# EAGLE board SparkFun_FreeSoC2_Panel_v10 (EAGLE 6.6.0), part 1 of 11
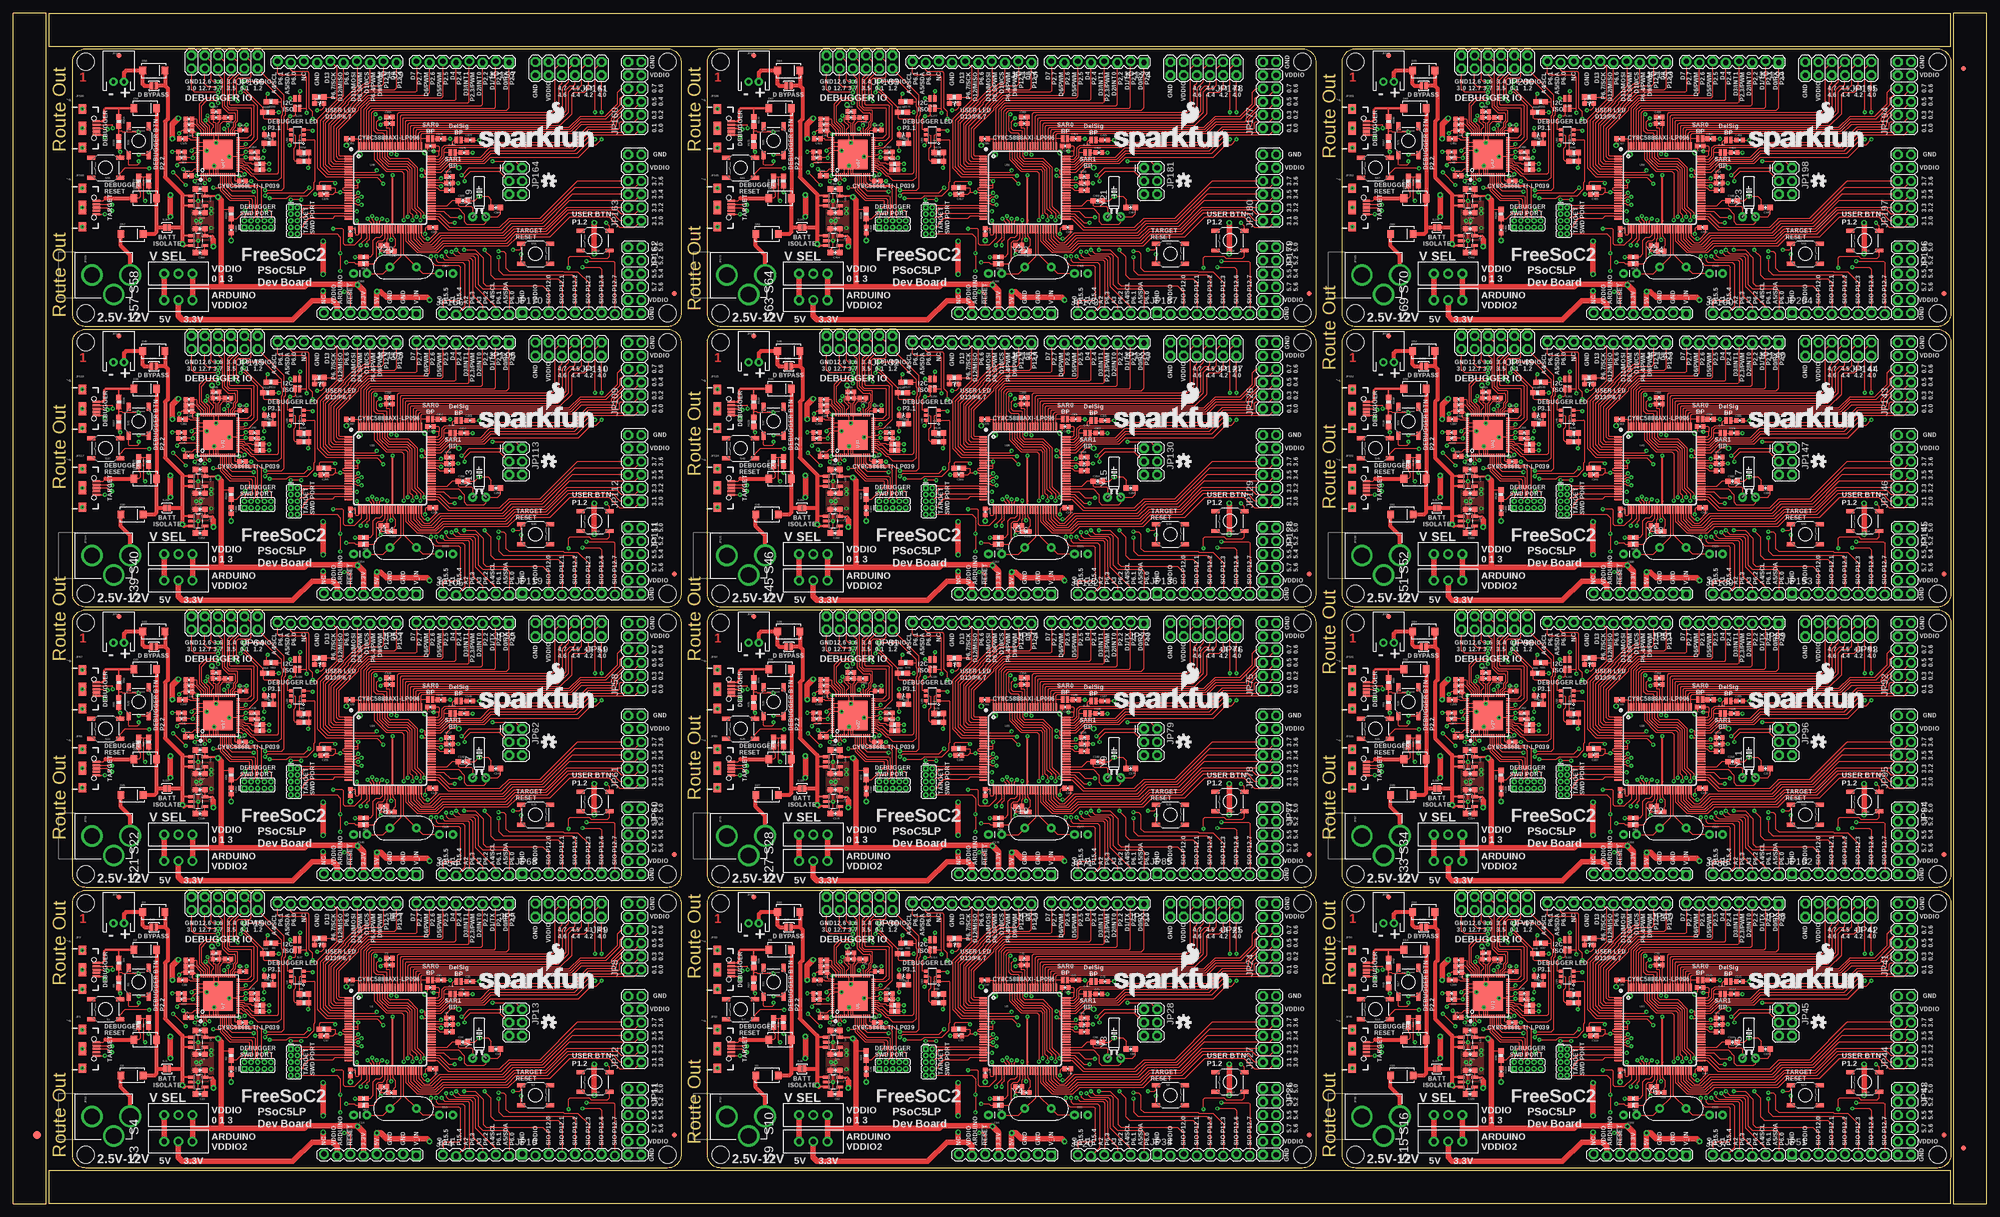
[diagram p0: board, top side]
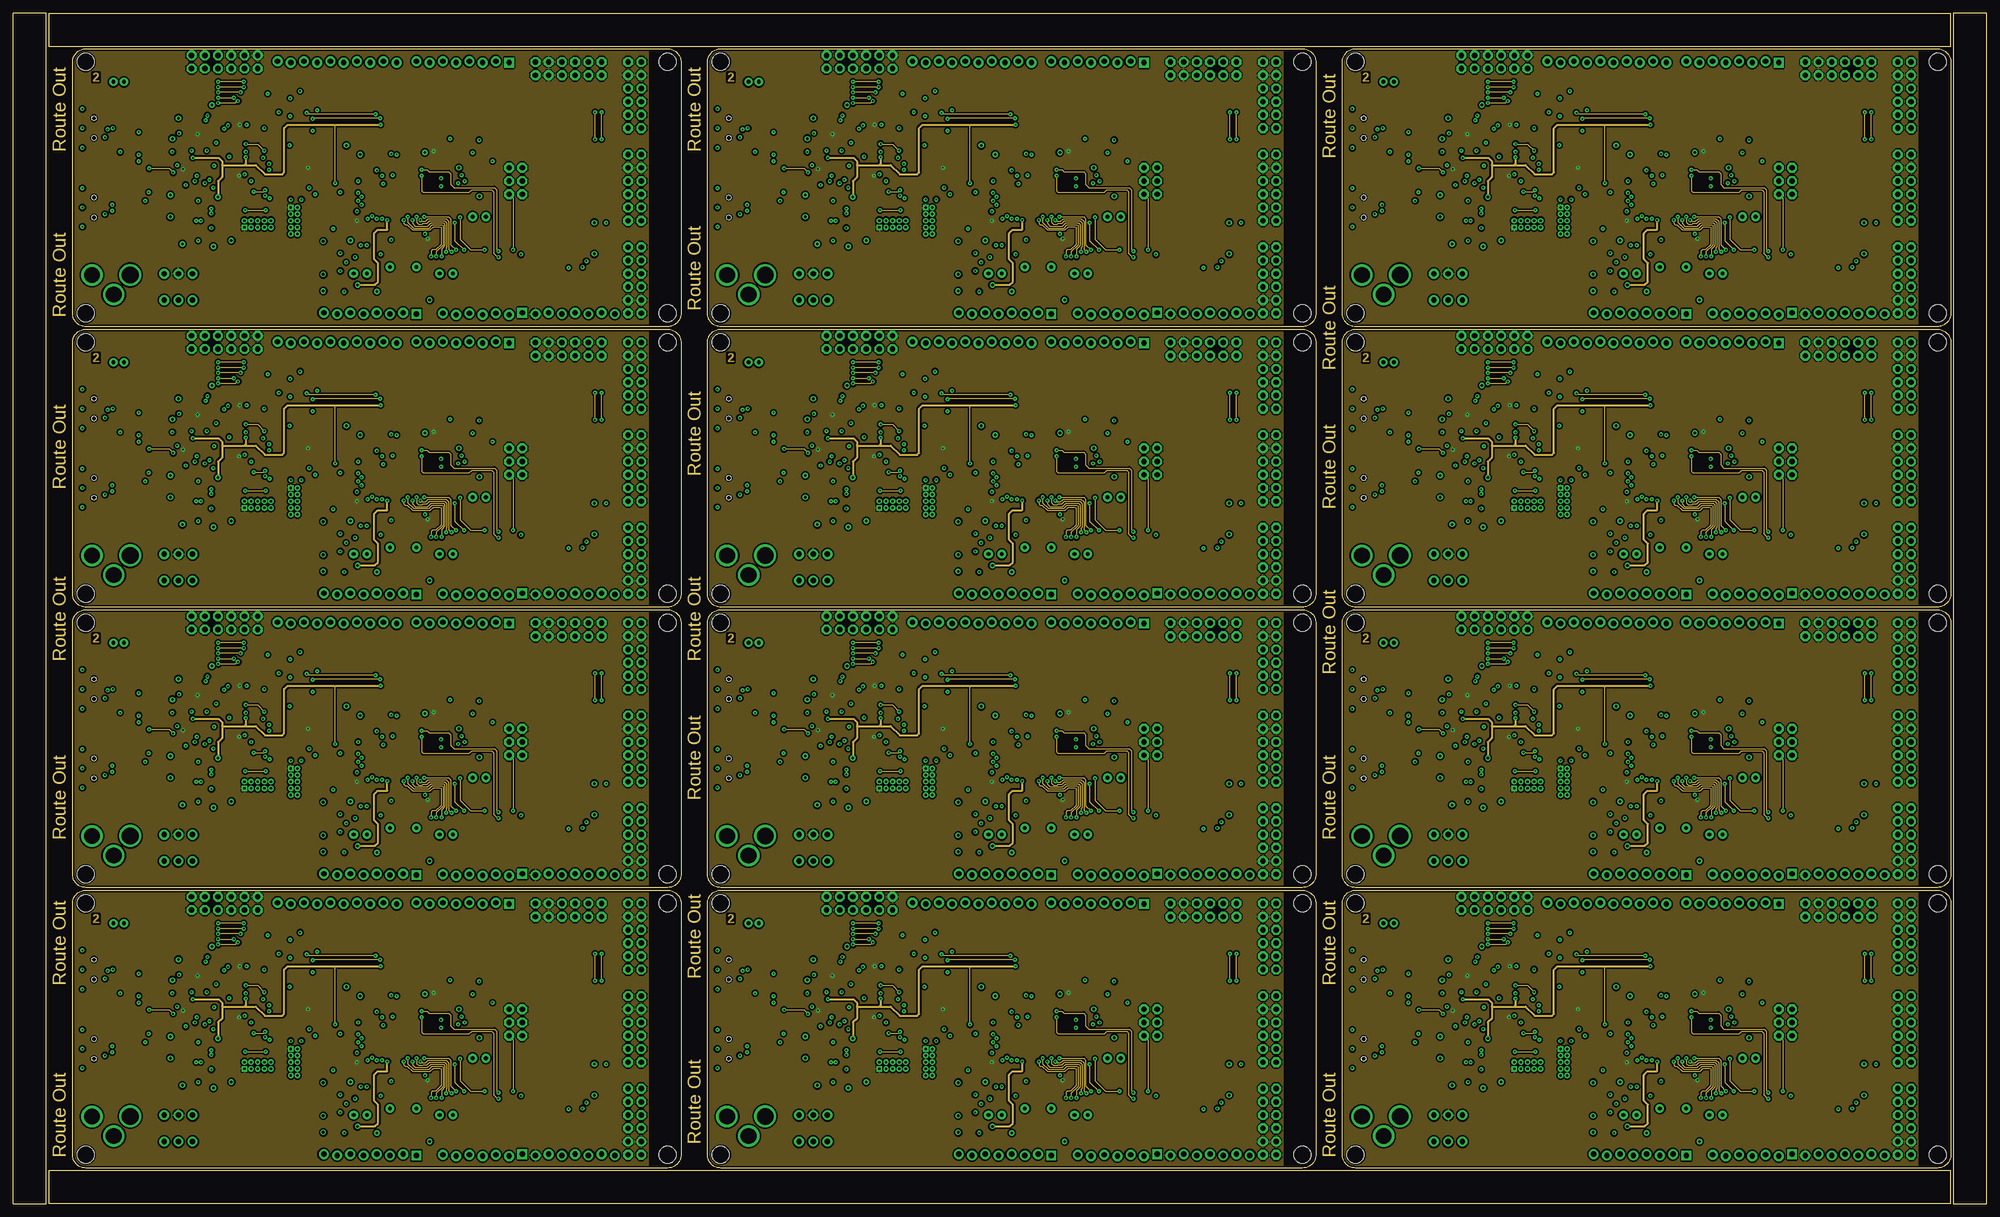
[diagram p1: board, inner layer Route2]
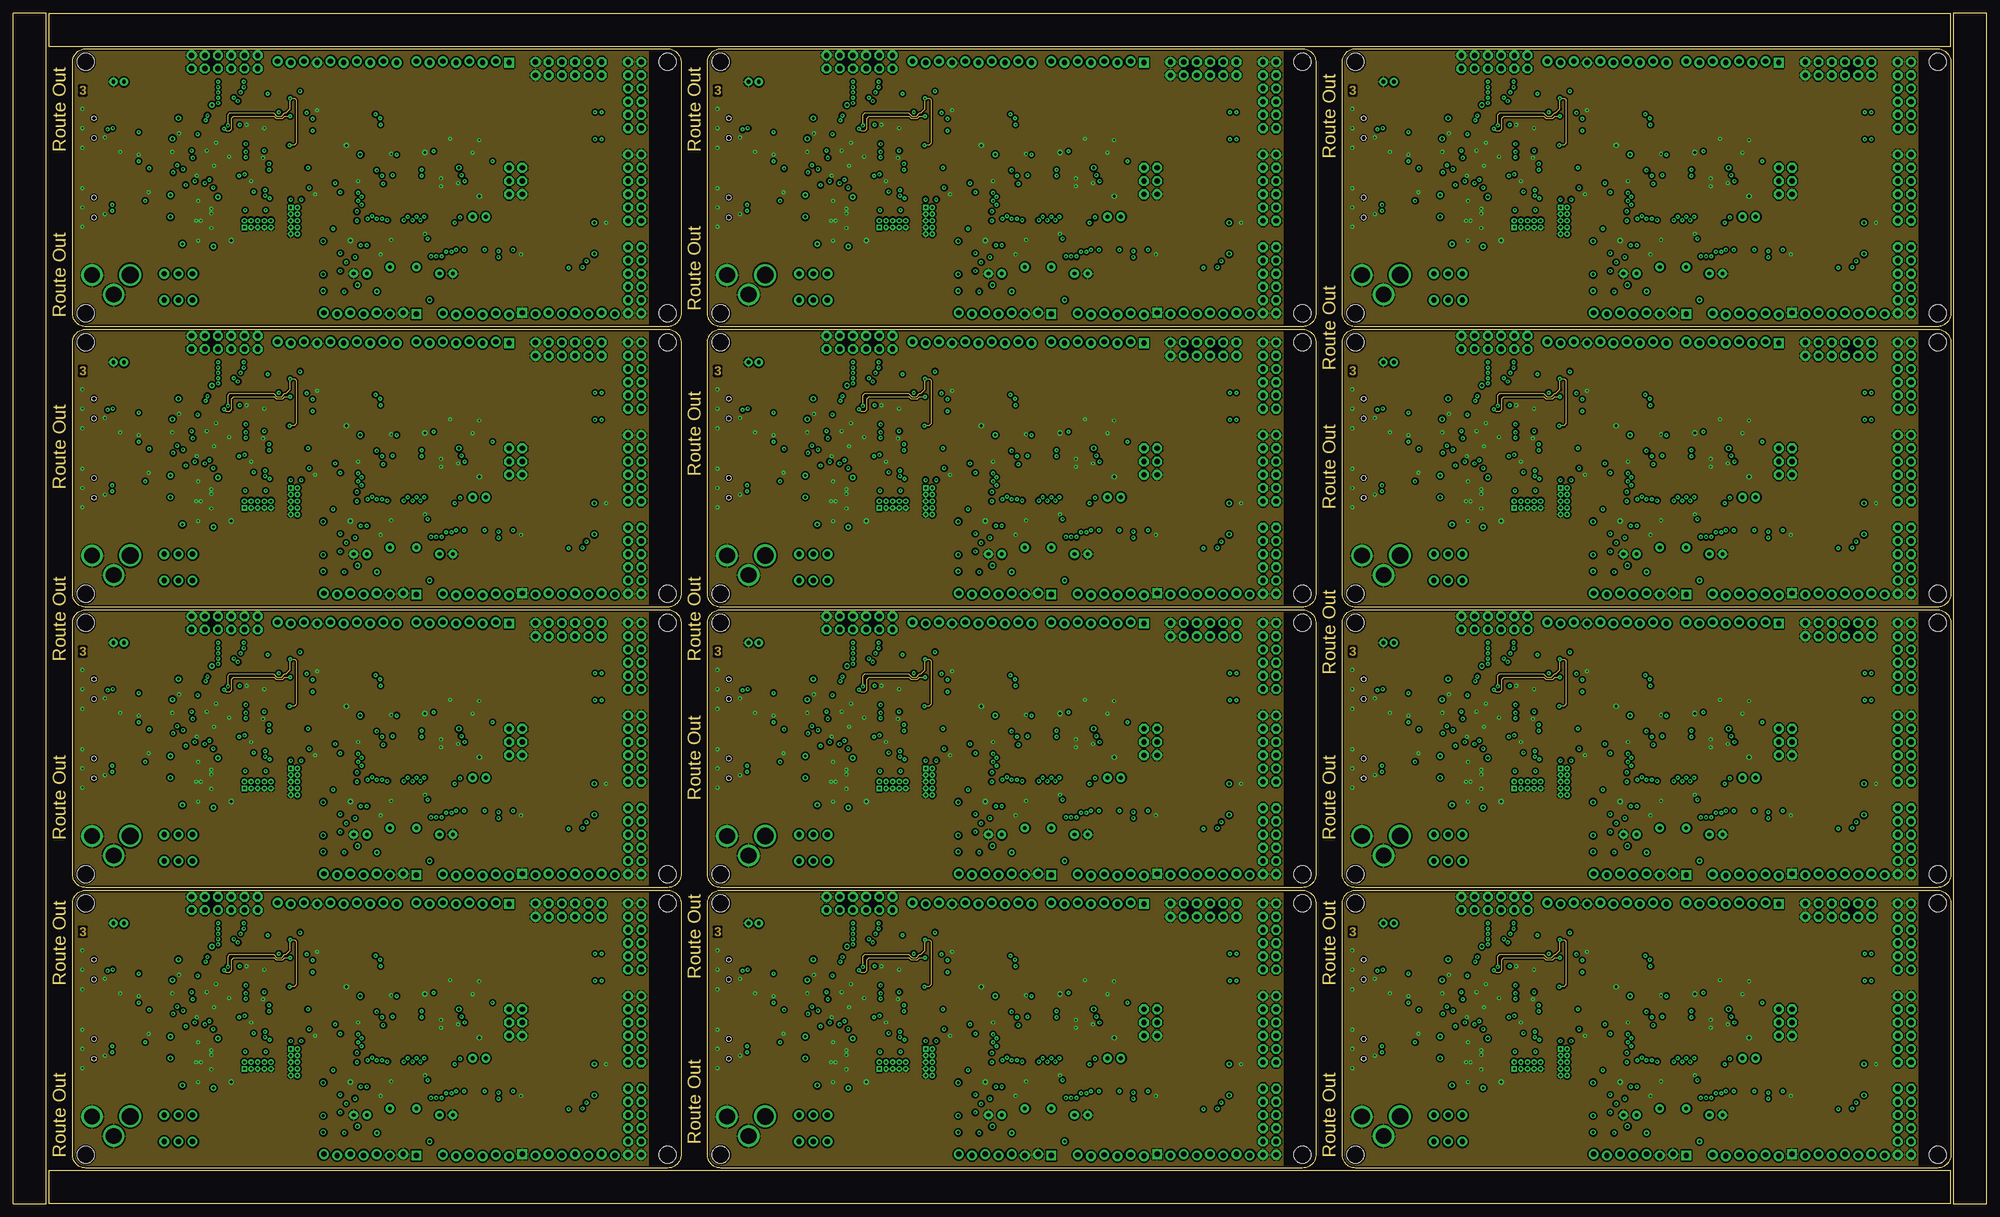
[diagram p2: board, inner layer Route15]
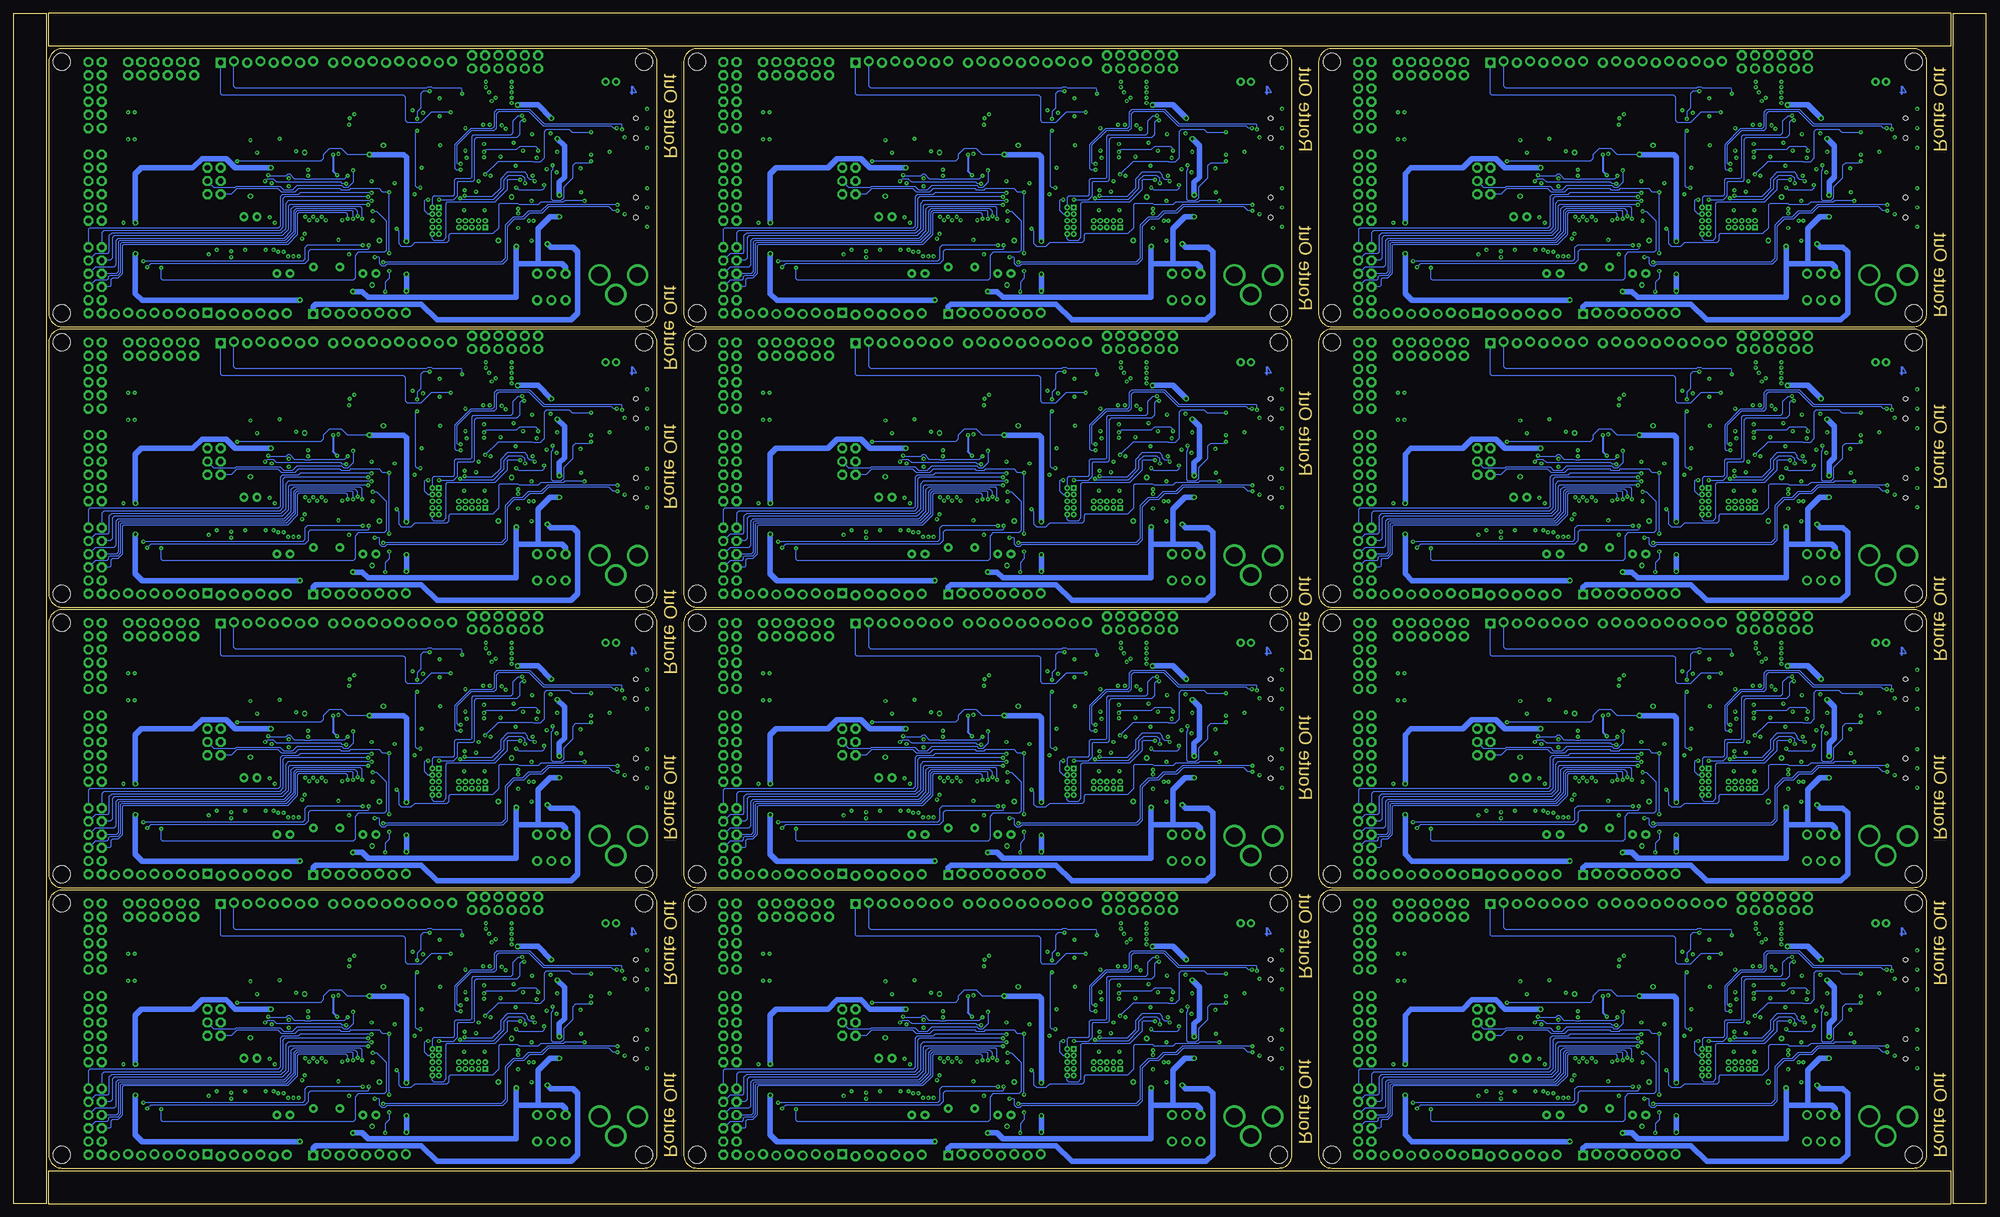
[diagram p3: board, bottom side, seen from below]

Size 378.97 x 228.6 mm. Coordinates in mm from the lower left corner, seen from the top.
Outline: 125.73,6.86 13.97,6.86 arc-90 11.43,9.4 11.43,57.66 arc-90 13.97,60.2 125.73,60.2 arc-90 128.27,57.66 128.27,9.4 arc-90 125.73,6.86
Outline: 247.65,6.86 135.89,6.86 arc-90 133.35,9.4 133.35,57.66 arc-90 135.89,60.2 247.65,60.2 arc-90 250.19,57.66 250.19,9.4 arc-90 247.65,6.86
Outline: 369.57,6.86 257.81,6.86 arc-90 255.27,9.4 255.27,57.66 arc-90 257.81,60.2 369.57,60.2 arc-90 372.11,57.66 372.11,9.4 arc-90 369.57,6.86
Outline: 125.73,60.71 13.97,60.71 arc-90 11.43,63.25 11.43,111.51 arc-90 13.97,114.05 125.73,114.05 arc-90 128.27,111.51 128.27,63.25 arc-90 125.73,60.71
Outline: 247.65,60.71 135.89,60.71 arc-90 133.35,63.25 133.35,111.51 arc-90 135.89,114.05 247.65,114.05 arc-90 250.19,111.51 250.19,63.25 arc-90 247.65,60.71
Outline: 369.57,60.71 257.81,60.71 arc-90 255.27,63.25 255.27,111.51 arc-90 257.81,114.05 369.57,114.05 arc-90 372.11,111.51 372.11,63.25 arc-90 369.57,60.71
Outline: 125.73,114.55 13.97,114.55 arc-90 11.43,117.09 11.43,165.35 arc-90 13.97,167.89 125.73,167.89 arc-90 128.27,165.35 128.27,117.09 arc-90 125.73,114.55
Outline: 247.65,114.55 135.89,114.55 arc-90 133.35,117.09 133.35,165.35 arc-90 135.89,167.89 247.65,167.89 arc-90 250.19,165.35 250.19,117.09 arc-90 247.65,114.55
Outline: 369.57,114.55 257.81,114.55 arc-90 255.27,117.09 255.27,165.35 arc-90 257.81,167.89 369.57,167.89 arc-90 372.11,165.35 372.11,117.09 arc-90 369.57,114.55
Outline: 125.73,168.4 13.97,168.4 arc-90 11.43,170.94 11.43,219.2 arc-90 13.97,221.74 125.73,221.74 arc-90 128.27,219.2 128.27,170.94 arc-90 125.73,168.4
Outline: 247.65,168.4 135.89,168.4 arc-90 133.35,170.94 133.35,219.2 arc-90 135.89,221.74 247.65,221.74 arc-90 250.19,219.2 250.19,170.94 arc-90 247.65,168.4
Outline: 369.57,168.4 257.81,168.4 arc-90 255.27,170.94 255.27,219.2 arc-90 257.81,221.74 369.57,221.74 arc-90 372.11,219.2 372.11,170.94 arc-90 369.57,168.4
Outline: 6.35,0 6.35,228.6 0,228.6 0,0 6.35,0
Outline: 6.86,6.35 6.86,0 372.11,0 372.11,6.35 6.86,6.35
Outline: 372.62,0 378.97,0 378.97,228.6 372.62,228.6 372.62,0
Outline: 372.11,222.25 372.11,228.6 6.86,228.6 6.86,222.25 372.11,222.25
Copper layers (1*2*15*16): Top 0.035mm / dielectric 1.5mm / Route2 0.035mm / dielectric 0.15mm / Route15 0.035mm / dielectric 0.2mm / Bottom 0.035mm
Design rules "Sparkfun-x *": minimum track width 6mil, minimum drill 10mil, track to track 6mil, track to pad 6mil, pad to pad 6mil, via to via 8mil, smd to smd 6mil, copper to edge 6mil, drill to drill 8mil, minimum pad ring 12mil, minimum via ring 10mil, stop-mask expansion 4mil, vias tented up to drill 20mil, thermal gap 10mil
Net classes: 0 signal: width 0.203 mm, drill 0.254 mm, clearance 0.152 mm; 1 AVCC: width 0.508 mm, drill 0.508 mm, clearance 0.152 mm; 2 ARDUINO_VCC: width 0.508 mm, drill 0.381 mm

## Footprints (pad centres in the part's own frame; a part is rotated, then mirrored left to right if it is on the bottom)
0402-CAP = smd 0.85 x 0.9: 1 -0.58,0; 2 0.58,0
0603-CAP = smd 1.1 x 1: 1 -0.85,0; 2 0.85,0
CAP-PTH-SMALL = drill 0.7 pad 1.651: 1 0,0; 2 2.54,0
SMA-DIODE = smd 1.27 x 1.47: A -2.15,0; C 2.15,0
LED-0603 = smd 1 x 1: A 0,-0.877; C 0,0.877
FIDUCIAL-1.5X3 = smd 1.5 x 1.5: 1 0,0
FIDUCIAL-1X2 = smd 1 x 1: 1 0,0
USB-B-MICRO-SMD_V03 = smd 1.4 x 0.4: D+1 2.7,0; D-1 2.7,0.65; GND1 2.7,-1.3; ID1 2.7,-0.65; VBUS1 2.7,1.3 | smd 1.5 x 1.8: SHIELD1 0,3.7; SHIELD2 0,-3.7 | smd 1.5 x 2.5: SHIELD3 0,0 | hole 0.85: 2.2,1.9; 2.2,-1.9
JST-2-PTH = drill 0.7 pad 1.6: 1 -1,0; 2 1,0
1X06-SIP_LOCK = drill 1.016 pad 1.88: 1 0,0; 2 2.54,-0.254; 3 5.08,0; 4 7.62,-0.254; 5 10.16,0; 6 12.7,-0.254
1X08_LOCK = drill 1.016 pad 1.88 square: 1 0,0.127 | drill 1.016 pad 1.88: 2 2.54,-0.127; 3 5.08,0.127; 4 7.62,-0.127; 5 10.16,0.127; 6 12.7,-0.127; 7 15.24,0.127; 8 17.78,-0.127
1X10_LOCK = drill 1.016 pad 1.88: 1 0,0.127; 2 2.54,-0.127; 3 5.08,0.127; 4 7.62,-0.127; 5 10.16,0.127; 6 12.7,-0.127; 7 15.24,0.127; 8 17.78,-0.127; 9 20.32,0.127; 10 22.86,-0.127
2X6 = drill 1.016 pad 1.88 octagon: 1 0,0; 2 0,2.54; 3 2.54,0; 4 2.54,2.54; 5 5.08,0; 6 5.08,2.54; 7 7.62,0; 8 7.62,2.54; 9 10.16,0; 10 10.16,2.54; 11 12.7,0; 12 12.7,2.54
2X3 = drill 1.016 pad 1.88 octagon: 1 0,0; 2 0,2.54; 3 2.54,0; 4 2.54,2.54; 5 5.08,0; 6 5.08,2.54
2X5_PTH_SILK_.05 = drill 0.432 square: 1 0,6.35 | drill 0.432: 2 1.27,6.35; 3 0,5.08; 4 1.27,5.08; 5 0,3.81; 6 1.27,3.81; 7 0,2.54; 8 1.27,2.54; 9 0,1.27; 10 1.27,1.27
POWER_JACK_PTH_LOCK = drill 2.997 pad 4.115: GND 0.025,6.557; GNDBREAK 3.762,10.7 | drill 3.2 pad 4.115: PWR 0,13.878
0603-RES = smd 1.1 x 1: 1 -0.85,0; 2 0.85,0
0402-RES = smd 0.85 x 0.9: 1 -0.58,0; 2 0.58,0
TACTILE-SWITCH-SMD = smd 1.524 x 0.762: 1 -2.794,1.905; 2 2.794,1.905; 3 -2.794,-1.905; 4 2.794,-1.905
SWITCH-SPDT_LOCK.007S = drill 1.016 pad 1.88: 1 0,2.718; 2 0,0; 3 0,-2.718
PAD-JUMPER-2-NC_BY_PASTE_YES_SILK = smd 0.635 x 1.27: 1 -0.401,0; 2 0.413,0
PAD-JUMPER-2-NO_YES_SILK = smd 0.635 x 1.27: 1 -0.45,0; 2 0.45,0
PAD-JUMPER-2-NO_NO_SILK = smd 0.635 x 1.27: 1 -0.45,0; 2 0.45,0
STAND-OFF = hole 3.302: 0,0
TQFP-100-14X14MM = smd 1.5 x 0.27: 1 -8,6; 2 -8,5.5; 3 -8,5; 4 -8,4.5; 5 -8,4; 6 -8,3.5; 7 -8,3; 8 -8,2.5; 9 -8,2; 10 -8,1.5; 11 -8,1; 12 -8,0.5; 13 -8,0; 14 -8,-0.5; 15 -8,-1; 16 -8,-1.5; 17 -8,-2; 18 -8,-2.5; 19 -8,-3; 20 -8,-3.5; 21 -8,-4; 22 -8,-4.5; 23 -8,-5; 24 -8,-5.5; 25 -8,-6; 51 8,-6; 52 8,-5.5; 53 8,-5; 54 8,-4.5; 55 8,-4; 56 8,-3.5; 57 8,-3; 58 8,-2.5; 59 8,-2; 60 8,-1.5; 61 8,-1; 62 8,-0.5; 63 8,0; 64 8,0.5; 65 8,1; 66 8,1.5; 67 8,2; 68 8,2.5; 69 8,3; 70 8,3.5; 71 8,4; 72 8,4.5; 73 8,5; 74 8,5.5; 75 8,6 | smd 0.27 x 1.5: 26 -6,-8; 27 -5.5,-8; 28 -5,-8; 29 -4.5,-8; 30 -4,-8; 31 -3.5,-8; 32 -3,-8; 33 -2.5,-8; 34 -2,-8; 35 -1.5,-8; 36 -1,-8; 37 -0.5,-8; 38 0,-8; 39 0.5,-8; 40 1,-8; 41 1.5,-8; 42 2,-8; 43 2.5,-8; 44 3,-8; 45 3.5,-8; 46 4,-8; 47 4.5,-8; 48 5,-8; 49 5.5,-8; 50 6,-8; 76 6,8; 77 5.5,8; 78 5,8; 79 4.5,8; 80 4,8; 81 3.5,8; 82 3,8; 83 2.5,8; 84 2,8; 85 1.5,8; 86 1,8; 87 0.5,8; 88 0,8; 89 -0.5,8; 90 -1,8; 91 -1.5,8; 92 -2,8; 93 -2.5,8; 94 -3,8; 95 -3.5,8; 96 -4,8; 97 -4.5,8; 98 -5,8; 99 -5.5,8; 100 -6,8
SOT23-5 = smd 0.55 x 1.2: 1 -0.95,-1.3; 2 0,-1.3; 3 0.95,-1.3; 4 0.95,1.3; 5 -0.95,1.3
SOT26 = smd 0.55 x 0.8: D1 -0.95,1.2; D2 0.95,1.2; G1 -0.95,-1.2; G2 0.95,-1.2; S1 0,1.2; S2 0,-1.2
QFN-68 = smd 0.6 x 0.2: 1 -3.9,3.2; 2 -3.9,2.8; 3 -3.9,2.4; 4 -3.9,2; 5 -3.9,1.6; 6 -3.9,1.2; 7 -3.9,0.8; 8 -3.9,0.4; 9 -3.9,0; 10 -3.9,-0.4; 11 -3.9,-0.8; 12 -3.9,-1.2; 13 -3.9,-1.6; 14 -3.9,-2; 15 -3.9,-2.4; 16 -3.9,-2.8; 17 -3.9,-3.2; 35 3.9,-3.2; 36 3.9,-2.8; 37 3.9,-2.4; 38 3.9,-2; 39 3.9,-1.6; 40 3.9,-1.2; 41 3.9,-0.8; 42 3.9,-0.4; 43 3.9,0; 44 3.9,0.4; 45 3.9,0.8; 46 3.9,1.2; 47 3.9,1.6; 48 3.9,2; 49 3.9,2.4; 50 3.9,2.8; 51 3.9,3.2 | smd 0.2 x 0.6: 18 -3.2,-3.9; 19 -2.8,-3.9; 20 -2.4,-3.9; 21 -2,-3.9; 22 -1.6,-3.9; 23 -1.2,-3.9; 24 -0.8,-3.9; 25 -0.4,-3.9; 26 0,-3.9; 27 0.4,-3.9; 28 0.8,-3.9; 29 1.2,-3.9; 30 1.6,-3.9; 31 2,-3.9; 32 2.4,-3.9; 33 2.8,-3.9; 34 3.2,-3.9; 52 3.2,3.9; 53 2.8,3.9; 54 2.4,3.9; 55 2,3.9; 56 1.6,3.9; 57 1.2,3.9; 58 0.8,3.9; 59 0.4,3.9; 60 0,3.9; 61 -0.4,3.9; 62 -0.8,3.9; 63 -1.2,3.9; 64 -1.6,3.9; 65 -2,3.9; 66 -2.4,3.9; 67 -2.8,3.9; 68 -3.2,3.9 | smd 5.7 x 5.7: 69 0,0
TC26H = drill 0.813 pad 1.676: 1 -1.27,0; 2 1.27,0
HC49US = drill 0.7 pad 1.651: 1 -2.54,0; 2 2.54,0

## Placement (x,y rotation side)
C1  1.0uF  [0402-CAP]  83.82,33.02 0 top
C2  1.0uF  [0402-CAP]  72.26,47.12 0 top
C3  0.1uF  [0402-CAP]  72.26,45.85 0 top
C4  1.0uF  [0402-CAP]  71.25,22.48 180 top
C5  1.0uF  [0402-CAP]  83.82,35.69 0 top
C6  0.1uF  [0402-CAP]  83.82,34.42 0 top
C7  1.0uF  [0402-CAP]  72.64,21.34 180 top
C8  470pF  [0603-CAP]  35.94,28.7 180 top
C9  0.1uF  [0402-CAP]  80.64,25.91 180 top
C10  470pF  [0603-CAP]  35.94,21.08 180 top
C11  0.1uF  [0402-CAP]  64.64,42.93 180 top
C12  [CAP-PTH-SMALL]  81.92,17.02 0 top
C13  0.1uF  [0402-CAP]  64.77,25.15 270 top
C14  [CAP-PTH-SMALL]  67.94,17.02 180 top
C15  0.1uF  [0402-CAP]  80.14,41.53 180 top
C16  1.0uF  [0402-CAP]  46.35,40.39 0 top
C17  1.0uF  [0402-CAP]  41.27,46.99 180 top
C18  22pF  [0603-CAP]  92.71,29.72 180 top
C19  1.0uF  [0402-CAP]  32.38,40.39 180 top
C20  1.0uF  [0402-CAP]  38.99,48.13 0 top
C21  0.1uF  [0402-CAP]  46.35,39.24 0 top
C22  0.1uF  [0402-CAP]  32.38,39.24 180 top
C23  0.1uF  [0402-CAP]  38.99,46.99 0 top
C24  22pF  [0603-CAP]  86.36,30.99 0 top
C25  0.1uF  [0402-CAP]  33.66,35.81 0 top
C26  2.2uF  [0603-CAP]  35.94,33.27 0 top
C27  0.1uF  [0402-CAP]  44.07,34.8 0 top
C28  2.2uF  [0603-CAP]  35.94,25.65 0 top
C29  0.1uF  [0402-CAP]  44.2,44.58 0 top
C30  0.1uF  [0402-CAP]  33.78,45.59 180 top
C31  0.1uF  [0402-CAP]  33.78,44.45 180 top
C32  0.1uF  [0402-CAP]  33.78,46.74 180 top
C33  0.1uF  [0402-CAP]  32.51,42.93 180 top
C34  0.1uF  [0402-CAP]  82.17,42.93 0 top
C35  0.1uF  [0402-CAP]  87.76,42.67 0 top
C36  0.1uF  [0402-CAP]  86.61,40.26 0 top
C37  0.1uF  [0402-CAP]  59.69,32.26 180 top
C38  0.1uF  [0402-CAP]  41.91,25.4 270 top
C39  1.0uF  [0402-CAP]  205.74,33.02 0 top
C40  1.0uF  [0402-CAP]  194.18,47.12 0 top
C41  1.0uF  [0402-CAP]  205.74,35.69 0 top
C42  0.1uF  [0402-CAP]  205.74,34.42 0 top
C43  0.1uF  [0402-CAP]  194.18,45.85 0 top
C44  1.0uF  [0402-CAP]  193.17,22.48 180 top
C45  1.0uF  [0402-CAP]  194.56,21.34 180 top
C46  0.1uF  [0402-CAP]  202.56,25.91 180 top
C47  0.1uF  [0402-CAP]  186.56,42.93 180 top
C48  0.1uF  [0402-CAP]  186.69,25.15 270 top
C49  0.1uF  [0402-CAP]  202.06,41.53 180 top
C50  1.0uF  [0402-CAP]  168.28,40.39 0 top
C51  1.0uF  [0402-CAP]  163.19,46.99 180 top
C52  1.0uF  [0402-CAP]  154.31,40.39 180 top
C53  1.0uF  [0402-CAP]  160.91,48.13 0 top
C54  0.1uF  [0402-CAP]  168.28,39.24 0 top
C55  0.1uF  [0402-CAP]  154.31,39.24 180 top
C56  0.1uF  [0402-CAP]  160.91,46.99 0 top
C57  0.1uF  [0402-CAP]  155.57,35.81 0 top
C58  0.1uF  [0402-CAP]  165.99,34.8 0 top
C59  0.1uF  [0402-CAP]  166.12,44.58 0 top
C60  0.1uF  [0402-CAP]  155.7,44.45 180 top
C61  470pF  [0603-CAP]  157.86,28.7 180 top
C62  470pF  [0603-CAP]  157.86,21.08 180 top
C63  [CAP-PTH-SMALL]  203.84,17.02 0 top
C64  [CAP-PTH-SMALL]  189.87,17.02 180 top
C65  22pF  [0603-CAP]  214.63,29.72 180 top
C66  22pF  [0603-CAP]  208.28,30.99 0 top
C67  2.2uF  [0603-CAP]  157.86,33.27 0 top
C68  2.2uF  [0603-CAP]  157.86,25.65 0 top
C69  0.1uF  [0402-CAP]  155.7,45.59 180 top
C70  0.1uF  [0402-CAP]  155.7,46.74 180 top
C71  0.1uF  [0402-CAP]  154.43,42.93 180 top
C72  0.1uF  [0402-CAP]  204.09,42.93 0 top
C73  0.1uF  [0402-CAP]  209.68,42.67 0 top
C74  0.1uF  [0402-CAP]  208.53,40.26 0 top
C75  0.1uF  [0402-CAP]  181.61,32.26 180 top
C76  0.1uF  [0402-CAP]  163.83,25.4 270 top
C77  1.0uF  [0402-CAP]  327.66,33.02 0 top
C78  1.0uF  [0402-CAP]  316.1,47.12 0 top
C79  1.0uF  [0402-CAP]  327.66,35.69 0 top
C80  0.1uF  [0402-CAP]  327.66,34.42 0 top
C81  0.1uF  [0402-CAP]  316.1,45.85 0 top
C82  1.0uF  [0402-CAP]  315.09,22.48 180 top
C83  1.0uF  [0402-CAP]  316.48,21.34 180 top
C84  0.1uF  [0402-CAP]  324.49,25.91 180 top
C85  0.1uF  [0402-CAP]  308.48,42.93 180 top
C86  0.1uF  [0402-CAP]  308.61,25.15 270 top
C87  0.1uF  [0402-CAP]  323.98,41.53 180 top
C88  1.0uF  [0402-CAP]  290.19,40.39 0 top
C89  1.0uF  [0402-CAP]  285.12,46.99 180 top
C90  1.0uF  [0402-CAP]  276.23,40.39 180 top
C91  1.0uF  [0402-CAP]  282.83,48.13 0 top
C92  0.1uF  [0402-CAP]  290.19,39.24 0 top
C93  0.1uF  [0402-CAP]  276.23,39.24 180 top
C94  0.1uF  [0402-CAP]  282.83,46.99 0 top
C95  0.1uF  [0402-CAP]  277.5,35.81 0 top
C96  0.1uF  [0402-CAP]  287.91,34.8 0 top
C97  0.1uF  [0402-CAP]  288.04,44.58 0 top
C98  0.1uF  [0402-CAP]  277.62,44.45 180 top
C99  470pF  [0603-CAP]  279.78,28.7 180 top
C100  470pF  [0603-CAP]  279.78,21.08 180 top
C101  [CAP-PTH-SMALL]  325.75,17.02 0 top
C102  [CAP-PTH-SMALL]  311.79,17.02 180 top
C103  22pF  [0603-CAP]  336.55,29.72 180 top
C104  22pF  [0603-CAP]  330.2,30.99 0 top
C105  2.2uF  [0603-CAP]  279.78,33.27 0 top
C106  2.2uF  [0603-CAP]  279.78,25.65 0 top
C107  0.1uF  [0402-CAP]  277.62,45.59 180 top
C108  0.1uF  [0402-CAP]  277.62,46.74 180 top
C109  0.1uF  [0402-CAP]  276.35,42.93 180 top
C110  0.1uF  [0402-CAP]  326.01,42.93 0 top
C111  0.1uF  [0402-CAP]  331.6,42.67 0 top
C112  0.1uF  [0402-CAP]  330.45,40.26 0 top
C113  0.1uF  [0402-CAP]  303.53,32.26 180 top
C114  0.1uF  [0402-CAP]  285.75,25.4 270 top
C115  1.0uF  [0402-CAP]  83.82,86.87 0 top
C116  1.0uF  [0402-CAP]  72.26,100.97 0 top
C117  1.0uF  [0402-CAP]  83.82,89.53 0 top
C118  0.1uF  [0402-CAP]  83.82,88.27 0 top
C119  0.1uF  [0402-CAP]  72.26,99.69 0 top
C120  1.0uF  [0402-CAP]  71.25,76.33 180 top
C121  1.0uF  [0402-CAP]  72.64,75.18 180 top
C122  0.1uF  [0402-CAP]  80.64,79.76 180 top
C123  0.1uF  [0402-CAP]  64.64,96.77 180 top
C124  0.1uF  [0402-CAP]  64.77,78.99 270 top
C125  0.1uF  [0402-CAP]  80.14,95.38 180 top
C126  1.0uF  [0402-CAP]  46.35,94.23 0 top
C127  1.0uF  [0402-CAP]  41.27,100.84 180 top
C128  1.0uF  [0402-CAP]  32.38,94.23 180 top
C129  1.0uF  [0402-CAP]  38.99,101.98 0 top
C130  0.1uF  [0402-CAP]  46.35,93.09 0 top
C131  0.1uF  [0402-CAP]  32.38,93.09 180 top
C132  0.1uF  [0402-CAP]  38.99,100.84 0 top
C133  0.1uF  [0402-CAP]  33.66,89.66 0 top
C134  0.1uF  [0402-CAP]  44.07,88.65 0 top
C135  0.1uF  [0402-CAP]  44.2,98.42 0 top
C136  0.1uF  [0402-CAP]  33.78,98.3 180 top
C137  470pF  [0603-CAP]  35.94,82.55 180 top
C138  470pF  [0603-CAP]  35.94,74.93 180 top
C139  [CAP-PTH-SMALL]  81.92,70.87 0 top
C140  [CAP-PTH-SMALL]  67.94,70.87 180 top
C141  22pF  [0603-CAP]  92.71,83.57 180 top
C142  22pF  [0603-CAP]  86.36,84.84 0 top
C143  2.2uF  [0603-CAP]  35.94,87.12 0 top
C144  2.2uF  [0603-CAP]  35.94,79.5 0 top
C145  0.1uF  [0402-CAP]  33.78,99.44 180 top
C146  0.1uF  [0402-CAP]  33.78,100.58 180 top
C147  0.1uF  [0402-CAP]  32.51,96.77 180 top
C148  0.1uF  [0402-CAP]  82.17,96.77 0 top
C149  0.1uF  [0402-CAP]  87.76,96.52 0 top
C150  0.1uF  [0402-CAP]  86.61,94.11 0 top
C151  0.1uF  [0402-CAP]  59.69,86.11 180 top
C152  0.1uF  [0402-CAP]  41.91,79.25 270 top
C153  1.0uF  [0402-CAP]  205.74,86.87 0 top
C154  1.0uF  [0402-CAP]  194.18,100.97 0 top
C155  1.0uF  [0402-CAP]  205.74,89.53 0 top
C156  0.1uF  [0402-CAP]  205.74,88.27 0 top
C157  0.1uF  [0402-CAP]  194.18,99.69 0 top
C158  1.0uF  [0402-CAP]  193.17,76.33 180 top
C159  1.0uF  [0402-CAP]  194.56,75.18 180 top
C160  0.1uF  [0402-CAP]  202.56,79.76 180 top
C161  0.1uF  [0402-CAP]  186.56,96.77 180 top
C162  0.1uF  [0402-CAP]  186.69,78.99 270 top
C163  0.1uF  [0402-CAP]  202.06,95.38 180 top
C164  1.0uF  [0402-CAP]  168.28,94.23 0 top
C165  1.0uF  [0402-CAP]  163.19,100.84 180 top
C166  1.0uF  [0402-CAP]  154.31,94.23 180 top
C167  1.0uF  [0402-CAP]  160.91,101.98 0 top
C168  0.1uF  [0402-CAP]  168.28,93.09 0 top
C169  0.1uF  [0402-CAP]  154.31,93.09 180 top
C170  0.1uF  [0402-CAP]  160.91,100.84 0 top
C171  0.1uF  [0402-CAP]  155.57,89.66 0 top
C172  0.1uF  [0402-CAP]  165.99,88.65 0 top
C173  0.1uF  [0402-CAP]  166.12,98.42 0 top
C174  0.1uF  [0402-CAP]  155.7,98.3 180 top
C175  470pF  [0603-CAP]  157.86,82.55 180 top
C176  470pF  [0603-CAP]  157.86,74.93 180 top
C177  [CAP-PTH-SMALL]  203.84,70.87 0 top
C178  [CAP-PTH-SMALL]  189.87,70.87 180 top
C179  22pF  [0603-CAP]  214.63,83.57 180 top
C180  22pF  [0603-CAP]  208.28,84.84 0 top
C181  2.2uF  [0603-CAP]  157.86,87.12 0 top
C182  2.2uF  [0603-CAP]  157.86,79.5 0 top
C183  0.1uF  [0402-CAP]  155.7,99.44 180 top
C184  0.1uF  [0402-CAP]  155.7,100.58 180 top
C185  0.1uF  [0402-CAP]  154.43,96.77 180 top
C186  0.1uF  [0402-CAP]  204.09,96.77 0 top
C187  0.1uF  [0402-CAP]  209.68,96.52 0 top
C188  0.1uF  [0402-CAP]  208.53,94.11 0 top
C189  0.1uF  [0402-CAP]  181.61,86.11 180 top
C190  0.1uF  [0402-CAP]  163.83,79.25 270 top
C191  1.0uF  [0402-CAP]  327.66,86.87 0 top
C192  1.0uF  [0402-CAP]  316.1,100.97 0 top
C193  1.0uF  [0402-CAP]  327.66,89.53 0 top
C194  0.1uF  [0402-CAP]  327.66,88.27 0 top
C195  0.1uF  [0402-CAP]  316.1,99.69 0 top
C196  1.0uF  [0402-CAP]  315.09,76.33 180 top
C197  1.0uF  [0402-CAP]  316.48,75.18 180 top
C198  0.1uF  [0402-CAP]  324.49,79.76 180 top
C199  0.1uF  [0402-CAP]  308.48,96.77 180 top
C200  0.1uF  [0402-CAP]  308.61,78.99 270 top
C201  0.1uF  [0402-CAP]  323.98,95.38 180 top
C202  1.0uF  [0402-CAP]  290.19,94.23 0 top
C203  1.0uF  [0402-CAP]  285.12,100.84 180 top
C204  1.0uF  [0402-CAP]  276.23,94.23 180 top
C205  1.0uF  [0402-CAP]  282.83,101.98 0 top
C206  0.1uF  [0402-CAP]  290.19,93.09 0 top
C207  0.1uF  [0402-CAP]  276.23,93.09 180 top
C208  0.1uF  [0402-CAP]  282.83,100.84 0 top
C209  0.1uF  [0402-CAP]  277.5,89.66 0 top
C210  0.1uF  [0402-CAP]  287.91,88.65 0 top
C211  0.1uF  [0402-CAP]  288.04,98.42 0 top
C212  0.1uF  [0402-CAP]  277.62,98.3 180 top
C213  470pF  [0603-CAP]  279.78,82.55 180 top
C214  470pF  [0603-CAP]  279.78,74.93 180 top
C215  [CAP-PTH-SMALL]  325.75,70.87 0 top
C216  [CAP-PTH-SMALL]  311.79,70.87 180 top
C217  22pF  [0603-CAP]  336.55,83.57 180 top
C218  22pF  [0603-CAP]  330.2,84.84 0 top
C219  2.2uF  [0603-CAP]  279.78,87.12 0 top
C220  2.2uF  [0603-CAP]  279.78,79.5 0 top
C221  0.1uF  [0402-CAP]  277.62,99.44 180 top
C222  0.1uF  [0402-CAP]  277.62,100.58 180 top
C223  0.1uF  [0402-CAP]  276.35,96.77 180 top
C224  0.1uF  [0402-CAP]  326.01,96.77 0 top
C225  0.1uF  [0402-CAP]  331.6,96.52 0 top
C226  0.1uF  [0402-CAP]  330.45,94.11 0 top
C227  0.1uF  [0402-CAP]  303.53,86.11 180 top
C228  0.1uF  [0402-CAP]  285.75,79.25 270 top
C229  1.0uF  [0402-CAP]  83.82,140.72 0 top
C230  1.0uF  [0402-CAP]  72.26,154.81 0 top
C231  1.0uF  [0402-CAP]  83.82,143.38 0 top
C232  0.1uF  [0402-CAP]  83.82,142.11 0 top
C233  0.1uF  [0402-CAP]  72.26,153.54 0 top
C234  1.0uF  [0402-CAP]  71.25,130.18 180 top
C235  1.0uF  [0402-CAP]  72.64,129.03 180 top
C236  0.1uF  [0402-CAP]  80.64,133.6 180 top
C237  0.1uF  [0402-CAP]  64.64,150.62 180 top
C238  0.1uF  [0402-CAP]  64.77,132.84 270 top
C239  0.1uF  [0402-CAP]  80.14,149.22 180 top
C240  1.0uF  [0402-CAP]  46.35,148.08 0 top
C241  1.0uF  [0402-CAP]  41.27,154.69 180 top
C242  1.0uF  [0402-CAP]  32.38,148.08 180 top
C243  1.0uF  [0402-CAP]  38.99,155.83 0 top
C244  0.1uF  [0402-CAP]  46.35,146.94 0 top
C245  0.1uF  [0402-CAP]  32.38,146.94 180 top
C246  0.1uF  [0402-CAP]  38.99,154.69 0 top
C247  0.1uF  [0402-CAP]  33.66,143.51 0 top
C248  0.1uF  [0402-CAP]  44.07,142.49 0 top
C249  0.1uF  [0402-CAP]  44.2,152.27 0 top
C250  0.1uF  [0402-CAP]  33.78,152.15 180 top
C251  470pF  [0603-CAP]  35.94,136.4 180 top
C252  470pF  [0603-CAP]  35.94,128.78 180 top
C253  [CAP-PTH-SMALL]  81.92,124.71 0 top
C254  [CAP-PTH-SMALL]  67.94,124.71 180 top
C255  22pF  [0603-CAP]  92.71,137.41 180 top
C256  22pF  [0603-CAP]  86.36,138.68 0 top
C257  2.2uF  [0603-CAP]  35.94,140.97 0 top
C258  2.2uF  [0603-CAP]  35.94,133.35 0 top
C259  0.1uF  [0402-CAP]  33.78,153.29 180 top
C260  0.1uF  [0402-CAP]  33.78,154.43 180 top
C261  0.1uF  [0402-CAP]  32.51,150.62 180 top
C262  0.1uF  [0402-CAP]  82.17,150.62 0 top
C263  0.1uF  [0402-CAP]  87.76,150.37 0 top
C264  0.1uF  [0402-CAP]  86.61,147.96 0 top
C265  0.1uF  [0402-CAP]  59.69,139.95 180 top
C266  0.1uF  [0402-CAP]  41.91,133.1 270 top
C267  1.0uF  [0402-CAP]  205.74,140.72 0 top
C268  1.0uF  [0402-CAP]  194.18,154.81 0 top
C269  1.0uF  [0402-CAP]  205.74,143.38 0 top
C270  0.1uF  [0402-CAP]  205.74,142.11 0 top
C271  0.1uF  [0402-CAP]  194.18,153.54 0 top
C272  1.0uF  [0402-CAP]  193.17,130.18 180 top
C273  1.0uF  [0402-CAP]  194.56,129.03 180 top
C274  0.1uF  [0402-CAP]  202.56,133.6 180 top
C275  0.1uF  [0402-CAP]  186.56,150.62 180 top
C276  0.1uF  [0402-CAP]  186.69,132.84 270 top
C277  0.1uF  [0402-CAP]  202.06,149.22 180 top
C278  1.0uF  [0402-CAP]  168.28,148.08 0 top
C279  1.0uF  [0402-CAP]  163.19,154.69 180 top
C280  1.0uF  [0402-CAP]  154.31,148.08 180 top
C281  1.0uF  [0402-CAP]  160.91,155.83 0 top
C282  0.1uF  [0402-CAP]  168.28,146.94 0 top
C283  0.1uF  [0402-CAP]  154.31,146.94 180 top
C284  0.1uF  [0402-CAP]  160.91,154.69 0 top
C285  0.1uF  [0402-CAP]  155.57,143.51 0 top
C286  0.1uF  [0402-CAP]  165.99,142.49 0 top
C287  0.1uF  [0402-CAP]  166.12,152.27 0 top
C288  0.1uF  [0402-CAP]  155.7,152.15 180 top
C289  470pF  [0603-CAP]  157.86,136.4 180 top
C290  470pF  [0603-CAP]  157.86,128.78 180 top
C291  [CAP-PTH-SMALL]  203.84,124.71 0 top
C292  [CAP-PTH-SMALL]  189.87,124.71 180 top
C293  22pF  [0603-CAP]  214.63,137.41 180 top
C294  22pF  [0603-CAP]  208.28,138.68 0 top
C295  2.2uF  [0603-CAP]  157.86,140.97 0 top
C296  2.2uF  [0603-CAP]  157.86,133.35 0 top
C297  0.1uF  [0402-CAP]  155.7,153.29 180 top
C298  0.1uF  [0402-CAP]  155.7,154.43 180 top
C299  0.1uF  [0402-CAP]  154.43,150.62 180 top
C300  0.1uF  [0402-CAP]  204.09,150.62 0 top
C301  0.1uF  [0402-CAP]  209.68,150.37 0 top
C302  0.1uF  [0402-CAP]  208.53,147.96 0 top
C303  0.1uF  [0402-CAP]  181.61,139.95 180 top
C304  0.1uF  [0402-CAP]  163.83,133.1 270 top
C305  1.0uF  [0402-CAP]  327.66,140.72 0 top
C306  1.0uF  [0402-CAP]  316.1,154.81 0 top
C307  1.0uF  [0402-CAP]  327.66,143.38 0 top
C308  0.1uF  [0402-CAP]  327.66,142.11 0 top
C309  0.1uF  [0402-CAP]  316.1,153.54 0 top
C310  1.0uF  [0402-CAP]  315.09,130.18 180 top
C311  1.0uF  [0402-CAP]  316.48,129.03 180 top
C312  0.1uF  [0402-CAP]  324.49,133.6 180 top
C313  0.1uF  [0402-CAP]  308.48,150.62 180 top
C314  0.1uF  [0402-CAP]  308.61,132.84 270 top
C315  0.1uF  [0402-CAP]  323.98,149.22 180 top
C316  1.0uF  [0402-CAP]  290.19,148.08 0 top
C317  1.0uF  [0402-CAP]  285.12,154.69 180 top
C318  1.0uF  [0402-CAP]  276.23,148.08 180 top
C319  1.0uF  [0402-CAP]  282.83,155.83 0 top
C320  0.1uF  [0402-CAP]  290.19,146.94 0 top
C321  0.1uF  [0402-CAP]  276.23,146.94 180 top
C322  0.1uF  [0402-CAP]  282.83,154.69 0 top
C323  0.1uF  [0402-CAP]  277.5,143.51 0 top
C324  0.1uF  [0402-CAP]  287.91,142.49 0 top
C325  0.1uF  [0402-CAP]  288.04,152.27 0 top
C326  0.1uF  [0402-CAP]  277.62,152.15 180 top
C327  470pF  [0603-CAP]  279.78,136.4 180 top
C328  470pF  [0603-CAP]  279.78,128.78 180 top
C329  [CAP-PTH-SMALL]  325.75,124.71 0 top
C330  [CAP-PTH-SMALL]  311.79,124.71 180 top
C331  22pF  [0603-CAP]  336.55,137.41 180 top
C332  22pF  [0603-CAP]  330.2,138.68 0 top
C333  2.2uF  [0603-CAP]  279.78,140.97 0 top
C334  2.2uF  [0603-CAP]  279.78,133.35 0 top
C335  0.1uF  [0402-CAP]  277.62,153.29 180 top
C336  0.1uF  [0402-CAP]  277.62,154.43 180 top
C337  0.1uF  [0402-CAP]  276.35,150.62 180 top
C338  0.1uF  [0402-CAP]  326.01,150.62 0 top
C339  0.1uF  [0402-CAP]  331.6,150.37 0 top
C340  0.1uF  [0402-CAP]  330.45,147.96 0 top
C341  0.1uF  [0402-CAP]  303.53,139.95 180 top
C342  0.1uF  [0402-CAP]  285.75,133.1 270 top
C343  1.0uF  [0402-CAP]  83.82,194.56 0 top
C344  1.0uF  [0402-CAP]  72.26,208.66 0 top
C345  1.0uF  [0402-CAP]  83.82,197.23 0 top
C346  0.1uF  [0402-CAP]  83.82,195.96 0 top
C347  0.1uF  [0402-CAP]  72.26,207.39 0 top
C348  1.0uF  [0402-CAP]  71.25,184.02 180 top
C349  1.0uF  [0402-CAP]  72.64,182.88 180 top
C350  0.1uF  [0402-CAP]  80.64,187.45 180 top
C351  0.1uF  [0402-CAP]  64.64,204.47 180 top
C352  0.1uF  [0402-CAP]  64.77,186.69 270 top
C353  0.1uF  [0402-CAP]  80.14,203.07 180 top
C354  1.0uF  [0402-CAP]  46.35,201.93 0 top
C355  1.0uF  [0402-CAP]  41.27,208.53 180 top
C356  1.0uF  [0402-CAP]  32.38,201.93 180 top
C357  1.0uF  [0402-CAP]  38.99,209.68 0 top
C358  0.1uF  [0402-CAP]  46.35,200.79 0 top
C359  0.1uF  [0402-CAP]  32.38,200.79 180 top
C360  0.1uF  [0402-CAP]  38.99,208.53 0 top
C361  0.1uF  [0402-CAP]  33.66,197.36 0 top
C362  0.1uF  [0402-CAP]  44.07,196.34 0 top
C363  0.1uF  [0402-CAP]  44.2,206.12 0 top
C364  0.1uF  [0402-CAP]  33.78,205.99 180 top
C365  470pF  [0603-CAP]  35.94,190.25 180 top
C366  470pF  [0603-CAP]  35.94,182.63 180 top
C367  [CAP-PTH-SMALL]  81.92,178.56 0 top
C368  [CAP-PTH-SMALL]  67.94,178.56 180 top
C369  22pF  [0603-CAP]  92.71,191.26 180 top
C370  22pF  [0603-CAP]  86.36,192.53 0 top
C371  2.2uF  [0603-CAP]  35.94,194.82 0 top
C372  2.2uF  [0603-CAP]  35.94,187.2 0 top
C373  0.1uF  [0402-CAP]  33.78,207.14 180 top
C374  0.1uF  [0402-CAP]  33.78,208.28 180 top
C375  0.1uF  [0402-CAP]  32.51,204.47 180 top
C376  0.1uF  [0402-CAP]  82.17,204.47 0 top
C377  0.1uF  [0402-CAP]  87.76,204.22 0 top
C378  0.1uF  [0402-CAP]  86.61,201.8 0 top
C379  0.1uF  [0402-CAP]  59.69,193.8 180 top
C380  0.1uF  [0402-CAP]  41.91,186.94 270 top
C381  1.0uF  [0402-CAP]  205.74,194.56 0 top
C382  1.0uF  [0402-CAP]  194.18,208.66 0 top
C383  1.0uF  [0402-CAP]  205.74,197.23 0 top
C384  0.1uF  [0402-CAP]  205.74,195.96 0 top
C385  0.1uF  [0402-CAP]  194.18,207.39 0 top
C386  1.0uF  [0402-CAP]  193.17,184.02 180 top
C387  1.0uF  [0402-CAP]  194.56,182.88 180 top
C388  0.1uF  [0402-CAP]  202.56,187.45 180 top
C389  0.1uF  [0402-CAP]  186.56,204.47 180 top
C390  0.1uF  [0402-CAP]  186.69,186.69 270 top
C391  0.1uF  [0402-CAP]  202.06,203.07 180 top
C392  1.0uF  [0402-CAP]  168.28,201.93 0 top
C393  1.0uF  [0402-CAP]  163.19,208.53 180 top
C394  1.0uF  [0402-CAP]  154.31,201.93 180 top
C395  1.0uF  [0402-CAP]  160.91,209.68 0 top
C396  0.1uF  [0402-CAP]  168.28,200.79 0 top
C397  0.1uF  [0402-CAP]  154.31,200.79 180 top
C398  0.1uF  [0402-CAP]  160.91,208.53 0 top
C399  0.1uF  [0402-CAP]  155.57,197.36 0 top
C400  0.1uF  [0402-CAP]  165.99,196.34 0 top
C401  0.1uF  [0402-CAP]  166.12,206.12 0 top
C402  0.1uF  [0402-CAP]  155.7,205.99 180 top
C403  470pF  [0603-CAP]  157.86,190.25 180 top
C404  470pF  [0603-CAP]  157.86,182.63 180 top
C405  [CAP-PTH-SMALL]  203.84,178.56 0 top
C406  [CAP-PTH-SMALL]  189.87,178.56 180 top
C407  22pF  [0603-CAP]  214.63,191.26 180 top
C408  22pF  [0603-CAP]  208.28,192.53 0 top
C409  2.2uF  [0603-CAP]  157.86,194.82 0 top
C410  2.2uF  [0603-CAP]  157.86,187.2 0 top
C411  0.1uF  [0402-CAP]  155.7,207.14 180 top
C412  0.1uF  [0402-CAP]  155.7,208.28 180 top
C413  0.1uF  [0402-CAP]  154.43,204.47 180 top
C414  0.1uF  [0402-CAP]  204.09,204.47 0 top
C415  0.1uF  [0402-CAP]  209.68,204.22 0 top
C416  0.1uF  [0402-CAP]  208.53,201.8 0 top
C417  0.1uF  [0402-CAP]  181.61,193.8 180 top
C418  0.1uF  [0402-CAP]  163.83,186.94 270 top
C419  1.0uF  [0402-CAP]  327.66,194.56 0 top
C420  1.0uF  [0402-CAP]  316.1,208.66 0 top
C421  1.0uF  [0402-CAP]  327.66,197.23 0 top
C422  0.1uF  [0402-CAP]  327.66,195.96 0 top
C423  0.1uF  [0402-CAP]  316.1,207.39 0 top
C424  1.0uF  [0402-CAP]  315.09,184.02 180 top
C425  1.0uF  [0402-CAP]  316.48,182.88 180 top
C426  0.1uF  [0402-CAP]  324.49,187.45 180 top
C427  0.1uF  [0402-CAP]  308.48,204.47 180 top
C428  0.1uF  [0402-CAP]  308.61,186.69 270 top
C429  0.1uF  [0402-CAP]  323.98,203.07 180 top
C430  1.0uF  [0402-CAP]  290.19,201.93 0 top
C431  1.0uF  [0402-CAP]  285.12,208.53 180 top
C432  1.0uF  [0402-CAP]  276.23,201.93 180 top
C433  1.0uF  [0402-CAP]  282.83,209.68 0 top
C434  0.1uF  [0402-CAP]  290.19,200.79 0 top
C435  0.1uF  [0402-CAP]  276.23,200.79 180 top
C436  0.1uF  [0402-CAP]  282.83,208.53 0 top
C437  0.1uF  [0402-CAP]  277.5,197.36 0 top
C438  0.1uF  [0402-CAP]  287.91,196.34 0 top
C439  0.1uF  [0402-CAP]  288.04,206.12 0 top
C440  0.1uF  [0402-CAP]  277.62,205.99 180 top
C441  470pF  [0603-CAP]  279.78,190.25 180 top
C442  470pF  [0603-CAP]  279.78,182.63 180 top
C443  [CAP-PTH-SMALL]  325.75,178.56 0 top
C444  [CAP-PTH-SMALL]  311.79,178.56 180 top
C445  22pF  [0603-CAP]  336.55,191.26 180 top
C446  22pF  [0603-CAP]  330.2,192.53 0 top
C447  2.2uF  [0603-CAP]  279.78,194.82 0 top
C448  2.2uF  [0603-CAP]  279.78,187.2 0 top
C449  0.1uF  [0402-CAP]  277.62,207.14 180 top
C450  0.1uF  [0402-CAP]  277.62,208.28 180 top
C451  0.1uF  [0402-CAP]  276.35,204.47 180 top
C452  0.1uF  [0402-CAP]  326.01,204.47 0 top
C453  0.1uF  [0402-CAP]  331.6,204.22 0 top
C454  0.1uF  [0402-CAP]  330.45,201.8 0 top
C455  0.1uF  [0402-CAP]  303.53,193.8 180 top
C456  0.1uF  [0402-CAP]  285.75,186.94 270 top
D1  MBRA140  [SMA-DIODE]  25.4,31.5 0 top
D2  MBRA140  [SMA-DIODE]  25.4,48.77 0 top
D3  MBRA140  [SMA-DIODE]  22.86,24.64 0 top
D4  MBRA140  [SMA-DIODE]  27.05,56.01 0 top
D5  RED  [LED-0603]  58.8,49.66 270 top
D6  RED  [LED-0603]  49.15,43.69 90 top
D7  MBRA140  [SMA-DIODE]  147.32,31.5 0 top
D8  MBRA140  [SMA-DIODE]  147.32,48.77 0 top
D9  MBRA140  [SMA-DIODE]  144.78,24.64 0 top
D10  MBRA140  [SMA-DIODE]  148.97,56.01 0 top
D11  RED  [LED-0603]  180.72,49.66 270 top
D12  RED  [LED-0603]  171.07,43.69 90 top
D13  MBRA140  [SMA-DIODE]  269.24,31.5 0 top
D14  MBRA140  [SMA-DIODE]  269.24,48.77 0 top
D15  MBRA140  [SMA-DIODE]  266.7,24.64 0 top
D16  MBRA140  [SMA-DIODE]  270.89,56.01 0 top
D17  RED  [LED-0603]  302.64,49.66 270 top
D18  RED  [LED-0603]  292.99,43.69 90 top
D19  MBRA140  [SMA-DIODE]  25.4,85.34 0 top
D20  MBRA140  [SMA-DIODE]  25.4,102.62 0 top
D21  MBRA140  [SMA-DIODE]  22.86,78.49 0 top
D22  MBRA140  [SMA-DIODE]  27.05,109.86 0 top
D23  RED  [LED-0603]  58.8,103.5 270 top
D24  RED  [LED-0603]  49.15,97.54 90 top
D25  MBRA140  [SMA-DIODE]  147.32,85.34 0 top
D26  MBRA140  [SMA-DIODE]  147.32,102.62 0 top
D27  MBRA140  [SMA-DIODE]  144.78,78.49 0 top
D28  MBRA140  [SMA-DIODE]  148.97,109.86 0 top
D29  RED  [LED-0603]  180.72,103.5 270 top
D30  RED  [LED-0603]  171.07,97.54 90 top
D31  MBRA140  [SMA-DIODE]  269.24,85.34 0 top
D32  MBRA140  [SMA-DIODE]  269.24,102.62 0 top
D33  MBRA140  [SMA-DIODE]  266.7,78.49 0 top
D34  MBRA140  [SMA-DIODE]  270.89,109.86 0 top
D35  RED  [LED-0603]  302.64,103.5 270 top
D36  RED  [LED-0603]  292.99,97.54 90 top
D37  MBRA140  [SMA-DIODE]  25.4,139.19 0 top
D38  MBRA140  [SMA-DIODE]  25.4,156.46 0 top
D39  MBRA140  [SMA-DIODE]  22.86,132.33 0 top
D40  MBRA140  [SMA-DIODE]  27.05,163.7 0 top
D41  RED  [LED-0603]  58.8,157.35 270 top
D42  RED  [LED-0603]  49.15,151.38 90 top
D43  MBRA140  [SMA-DIODE]  147.32,139.19 0 top
D44  MBRA140  [SMA-DIODE]  147.32,156.46 0 top
D45  MBRA140  [SMA-DIODE]  144.78,132.33 0 top
D46  MBRA140  [SMA-DIODE]  148.97,163.7 0 top
D47  RED  [LED-0603]  180.72,157.35 270 top
D48  RED  [LED-0603]  171.07,151.38 90 top
D49  MBRA140  [SMA-DIODE]  269.24,139.19 0 top
D50  MBRA140  [SMA-DIODE]  269.24,156.46 0 top
D51  MBRA140  [SMA-DIODE]  266.7,132.33 0 top
D52  MBRA140  [SMA-DIODE]  270.89,163.7 0 top
D53  RED  [LED-0603]  302.64,157.35 270 top
D54  RED  [LED-0603]  292.99,151.38 90 top
D55  MBRA140  [SMA-DIODE]  25.4,193.04 0 top
D56  MBRA140  [SMA-DIODE]  25.4,210.31 0 top
D57  MBRA140  [SMA-DIODE]  22.86,186.18 0 top
D58  MBRA140  [SMA-DIODE]  27.05,217.55 0 top
D59  RED  [LED-0603]  58.8,211.2 270 top
D60  RED  [LED-0603]  49.15,205.23 90 top
D61  MBRA140  [SMA-DIODE]  147.32,193.04 0 top
D62  MBRA140  [SMA-DIODE]  147.32,210.31 0 top
D63  MBRA140  [SMA-DIODE]  144.78,186.18 0 top
D64  MBRA140  [SMA-DIODE]  148.97,217.55 0 top
D65  RED  [LED-0603]  180.72,211.2 270 top
D66  RED  [LED-0603]  171.07,205.23 90 top
D67  MBRA140  [SMA-DIODE]  269.24,193.04 0 top
D68  MBRA140  [SMA-DIODE]  269.24,210.31 0 top
D69  MBRA140  [SMA-DIODE]  266.7,186.18 0 top
D70  MBRA140  [SMA-DIODE]  270.89,217.55 0 top
D71  RED  [LED-0603]  302.64,211.2 270 top
D72  RED  [LED-0603]  292.99,205.23 90 top
E$1  [FIDUCIAL-1.5X3]  4.57,13.21 0 top
E$4  [FIDUCIAL-1X2]  374.52,10.67 0 top
E$5  [FIDUCIAL-1X2]  374.52,217.93 180 top
FID1  FIDUCIAL1X2  [FIDUCIAL-1X2]  127,13.21 0 top
FID2  FIDUCIAL1X2  [FIDUCIAL-1X2]  20.32,58.93 0 top
FID3  FIDUCIAL1X2  [FIDUCIAL-1X2]  248.92,13.21 0 top
FID4  FIDUCIAL1X2  [FIDUCIAL-1X2]  142.24,58.93 0 top
FID5  FIDUCIAL1X2  [FIDUCIAL-1X2]  370.84,13.21 0 top
FID6  FIDUCIAL1X2  [FIDUCIAL-1X2]  264.16,58.93 0 top
FID7  FIDUCIAL1X2  [FIDUCIAL-1X2]  127,67.06 0 top
FID8  FIDUCIAL1X2  [FIDUCIAL-1X2]  20.32,112.78 0 top
FID9  FIDUCIAL1X2  [FIDUCIAL-1X2]  248.92,67.06 0 top
FID10  FIDUCIAL1X2  [FIDUCIAL-1X2]  142.24,112.78 0 top
FID11  FIDUCIAL1X2  [FIDUCIAL-1X2]  370.84,67.06 0 top
FID12  FIDUCIAL1X2  [FIDUCIAL-1X2]  264.16,112.78 0 top
FID13  FIDUCIAL1X2  [FIDUCIAL-1X2]  127,120.9 0 top
FID14  FIDUCIAL1X2  [FIDUCIAL-1X2]  20.32,166.62 0 top
FID15  FIDUCIAL1X2  [FIDUCIAL-1X2]  248.92,120.9 0 top
FID16  FIDUCIAL1X2  [FIDUCIAL-1X2]  142.24,166.62 0 top
FID17  FIDUCIAL1X2  [FIDUCIAL-1X2]  370.84,120.9 0 top
FID18  FIDUCIAL1X2  [FIDUCIAL-1X2]  264.16,166.62 0 top
FID19  FIDUCIAL1X2  [FIDUCIAL-1X2]  127,174.75 0 top
FID20  FIDUCIAL1X2  [FIDUCIAL-1X2]  20.32,220.47 0 top
FID21  FIDUCIAL1X2  [FIDUCIAL-1X2]  248.92,174.75 0 top
FID22  FIDUCIAL1X2  [FIDUCIAL-1X2]  142.24,220.47 0 top
FID23  FIDUCIAL1X2  [FIDUCIAL-1X2]  370.84,174.75 0 top
FID24  FIDUCIAL1X2  [FIDUCIAL-1X2]  264.16,220.47 0 top
JP1  MicroB  [USB-B-MICRO-SMD_V03]  13.34,29.72 0 top
JP2  MicroB  [USB-B-MICRO-SMD_V03]  13.34,44.96 0 top
JP3  M02JST-PTH-2  [JST-2-PTH]  20.32,53.85 0 top
JP4  1X6 FEMALE PTH  [1X06-SIP_LOCK]  82.55,9.4 0 top
JP5  1X8 FEMALE PTH  [1X08_LOCK]  95.25,57.66 180 top
JP6  1X8 FEMALE PTH  [1X08_LOCK]  77.47,9.4 180 top
JP7  1X10 FEMALE PTH  [1X10_LOCK]  73.66,57.66 180 top
JP8  2X6 FEMALE  [2X6]  120.65,44.96 90 top
JP9  2X6 FEMALE  [2X6]  113.03,57.66 180 top
JP10  1x8 FEMALE PTH  [1X08_LOCK]  97.79,9.4 0 top
JP11  2X6 FEMALE  [2X6]  118.11,22.1 270 top
JP12  2X6 FEMALE  [2X6]  120.65,27.18 90 top
JP13  [2X3]  95.25,37.34 270 top
JP14  DNP  [2X5_PTH_SILK_.05]  50.8,25.91 90 top
JP15  2X6 FEMALE  [2X6]  46.99,58.93 180 top
JP16  M02JST-PTH-2  [JST-2-PTH]  142.24,53.85 0 top
JP17  DNP  [2X5_PTH_SILK_.05]  53.34,23.37 0 top
JP18  POWER_JACKPTH_LOCK  [POWER_JACK_PTH_LOCK]  8.64,16.76 270 top
JP19  POWER_JACKPTH_LOCK  [POWER_JACK_PTH_LOCK]  130.56,16.76 270 top
JP20  1X6 FEMALE PTH  [1X06-SIP_LOCK]  204.47,9.4 0 top
JP21  1X8 FEMALE PTH  [1X08_LOCK]  217.17,57.66 180 top
JP22  1X8 FEMALE PTH  [1X08_LOCK]  199.39,9.4 180 top
JP23  1X10 FEMALE PTH  [1X10_LOCK]  195.58,57.66 180 top
JP24  2X6 FEMALE  [2X6]  242.57,44.96 90 top
JP25  2X6 FEMALE  [2X6]  234.95,57.66 180 top
JP26  2X6 FEMALE  [2X6]  240.03,22.1 270 top
JP27  2X6 FEMALE  [2X6]  242.57,27.18 90 top
JP28  [2X3]  217.17,37.34 270 top
JP29  DNP  [2X5_PTH_SILK_.05]  172.72,25.91 90 top
JP30  2X6 FEMALE  [2X6]  168.91,58.93 180 top
JP31  DNP  [2X5_PTH_SILK_.05]  175.26,23.37 0 top
JP32  MicroB  [USB-B-MICRO-SMD_V03]  135.25,29.72 0 top
JP33  MicroB  [USB-B-MICRO-SMD_V03]  135.25,44.96 0 top
JP34  1x8 FEMALE PTH  [1X08_LOCK]  219.71,9.4 0 top
JP35  M02JST-PTH-2  [JST-2-PTH]  264.16,53.85 0 top
JP36  POWER_JACKPTH_LOCK  [POWER_JACK_PTH_LOCK]  252.48,16.76 270 top
JP37  1X6 FEMALE PTH  [1X06-SIP_LOCK]  326.39,9.4 0 top
JP38  1X8 FEMALE PTH  [1X08_LOCK]  339.09,57.66 180 top
JP39  1X8 FEMALE PTH  [1X08_LOCK]  321.31,9.4 180 top
JP40  1X10 FEMALE PTH  [1X10_LOCK]  317.5,57.66 180 top
JP41  2X6 FEMALE  [2X6]  364.49,44.96 90 top
JP42  2X6 FEMALE  [2X6]  356.87,57.66 180 top
JP43  2X6 FEMALE  [2X6]  361.95,22.1 270 top
JP44  2X6 FEMALE  [2X6]  364.49,27.18 90 top
JP45  [2X3]  339.09,37.34 270 top
JP46  DNP  [2X5_PTH_SILK_.05]  294.64,25.91 90 top
JP47  2X6 FEMALE  [2X6]  290.83,58.93 180 top
JP48  DNP  [2X5_PTH_SILK_.05]  297.18,23.37 0 top
JP49  MicroB  [USB-B-MICRO-SMD_V03]  257.18,29.72 0 top
JP50  MicroB  [USB-B-MICRO-SMD_V03]  257.18,44.96 0 top
JP51  1x8 FEMALE PTH  [1X08_LOCK]  341.63,9.4 0 top
JP52  M02JST-PTH-2  [JST-2-PTH]  20.32,107.7 0 top
JP53  POWER_JACKPTH_LOCK  [POWER_JACK_PTH_LOCK]  8.64,70.61 270 top
JP54  1X6 FEMALE PTH  [1X06-SIP_LOCK]  82.55,63.25 0 top
JP55  1X8 FEMALE PTH  [1X08_LOCK]  95.25,111.51 180 top
JP56  1X8 FEMALE PTH  [1X08_LOCK]  77.47,63.25 180 top
JP57  1X10 FEMALE PTH  [1X10_LOCK]  73.66,111.51 180 top
JP58  2X6 FEMALE  [2X6]  120.65,98.81 90 top
JP59  2X6 FEMALE  [2X6]  113.03,111.51 180 top
JP60  2X6 FEMALE  [2X6]  118.11,75.95 270 top
JP61  2X6 FEMALE  [2X6]  120.65,81.03 90 top
JP62  [2X3]  95.25,91.19 270 top
JP63  DNP  [2X5_PTH_SILK_.05]  50.8,79.76 90 top
JP64  2X6 FEMALE  [2X6]  46.99,112.78 180 top
JP65  DNP  [2X5_PTH_SILK_.05]  53.34,77.22 0 top
JP66  MicroB  [USB-B-MICRO-SMD_V03]  13.34,83.57 0 top
JP67  MicroB  [USB-B-MICRO-SMD_V03]  13.34,98.81 0 top
JP68  1x8 FEMALE PTH  [1X08_LOCK]  97.79,63.25 0 top
JP69  M02JST-PTH-2  [JST-2-PTH]  142.24,107.7 0 top
JP70  POWER_JACKPTH_LOCK  [POWER_JACK_PTH_LOCK]  130.56,70.61 270 top
JP71  1X6 FEMALE PTH  [1X06-SIP_LOCK]  204.47,63.25 0 top
JP72  1X8 FEMALE PTH  [1X08_LOCK]  217.17,111.51 180 top
JP73  1X8 FEMALE PTH  [1X08_LOCK]  199.39,63.25 180 top
JP74  1X10 FEMALE PTH  [1X10_LOCK]  195.58,111.51 180 top
JP75  2X6 FEMALE  [2X6]  242.57,98.81 90 top
JP76  2X6 FEMALE  [2X6]  234.95,111.51 180 top
JP77  2X6 FEMALE  [2X6]  240.03,75.95 270 top
JP78  2X6 FEMALE  [2X6]  242.57,81.03 90 top
JP79  [2X3]  217.17,91.19 270 top
JP80  DNP  [2X5_PTH_SILK_.05]  172.72,79.76 90 top
JP81  2X6 FEMALE  [2X6]  168.91,112.78 180 top
JP82  DNP  [2X5_PTH_SILK_.05]  175.26,77.22 0 top
JP83  MicroB  [USB-B-MICRO-SMD_V03]  135.25,83.57 0 top
JP84  MicroB  [USB-B-MICRO-SMD_V03]  135.25,98.81 0 top
JP85  1x8 FEMALE PTH  [1X08_LOCK]  219.71,63.25 0 top
JP86  M02JST-PTH-2  [JST-2-PTH]  264.16,107.7 0 top
JP87  POWER_JACKPTH_LOCK  [POWER_JACK_PTH_LOCK]  252.48,70.61 270 top
JP88  1X6 FEMALE PTH  [1X06-SIP_LOCK]  326.39,63.25 0 top
JP89  1X8 FEMALE PTH  [1X08_LOCK]  339.09,111.51 180 top
JP90  1X8 FEMALE PTH  [1X08_LOCK]  321.31,63.25 180 top
JP91  1X10 FEMALE PTH  [1X10_LOCK]  317.5,111.51 180 top
JP92  2X6 FEMALE  [2X6]  364.49,98.81 90 top
JP93  2X6 FEMALE  [2X6]  356.87,111.51 180 top
JP94  2X6 FEMALE  [2X6]  361.95,75.95 270 top
JP95  2X6 FEMALE  [2X6]  364.49,81.03 90 top
JP96  [2X3]  339.09,91.19 270 top
JP97  DNP  [2X5_PTH_SILK_.05]  294.64,79.76 90 top
JP98  2X6 FEMALE  [2X6]  290.83,112.78 180 top
JP99  DNP  [2X5_PTH_SILK_.05]  297.18,77.22 0 top
JP100  MicroB  [USB-B-MICRO-SMD_V03]  257.18,83.57 0 top
JP101  MicroB  [USB-B-MICRO-SMD_V03]  257.18,98.81 0 top
JP102  1x8 FEMALE PTH  [1X08_LOCK]  341.63,63.25 0 top
JP103  M02JST-PTH-2  [JST-2-PTH]  20.32,161.54 0 top
JP104  POWER_JACKPTH_LOCK  [POWER_JACK_PTH_LOCK]  8.64,124.46 270 top
JP105  1X6 FEMALE PTH  [1X06-SIP_LOCK]  82.55,117.09 0 top
JP106  1X8 FEMALE PTH  [1X08_LOCK]  95.25,165.35 180 top
JP107  1X8 FEMALE PTH  [1X08_LOCK]  77.47,117.09 180 top
JP108  1X10 FEMALE PTH  [1X10_LOCK]  73.66,165.35 180 top
JP109  2X6 FEMALE  [2X6]  120.65,152.65 90 top
JP110  2X6 FEMALE  [2X6]  113.03,165.35 180 top
JP111  2X6 FEMALE  [2X6]  118.11,129.79 270 top
JP112  2X6 FEMALE  [2X6]  120.65,134.87 90 top
JP113  [2X3]  95.25,145.03 270 top
JP114  DNP  [2X5_PTH_SILK_.05]  50.8,133.6 90 top
JP115  2X6 FEMALE  [2X6]  46.99,166.62 180 top
JP116  DNP  [2X5_PTH_SILK_.05]  53.34,131.06 0 top
JP117  MicroB  [USB-B-MICRO-SMD_V03]  13.34,137.41 0 top
JP118  MicroB  [USB-B-MICRO-SMD_V03]  13.34,152.65 0 top
JP119  1x8 FEMALE PTH  [1X08_LOCK]  97.79,117.09 0 top
JP120  M02JST-PTH-2  [JST-2-PTH]  142.24,161.54 0 top
JP121  POWER_JACKPTH_LOCK  [POWER_JACK_PTH_LOCK]  130.56,124.46 270 top
JP122  1X6 FEMALE PTH  [1X06-SIP_LOCK]  204.47,117.09 0 top
JP123  1X8 FEMALE PTH  [1X08_LOCK]  217.17,165.35 180 top
JP124  1X8 FEMALE PTH  [1X08_LOCK]  199.39,117.09 180 top
JP125  1X10 FEMALE PTH  [1X10_LOCK]  195.58,165.35 180 top
JP126  2X6 FEMALE  [2X6]  242.57,152.65 90 top
JP127  2X6 FEMALE  [2X6]  234.95,165.35 180 top
JP128  2X6 FEMALE  [2X6]  240.03,129.79 270 top
JP129  2X6 FEMALE  [2X6]  242.57,134.87 90 top
JP130  [2X3]  217.17,145.03 270 top
JP131  DNP  [2X5_PTH_SILK_.05]  172.72,133.6 90 top
JP132  2X6 FEMALE  [2X6]  168.91,166.62 180 top
JP133  DNP  [2X5_PTH_SILK_.05]  175.26,131.06 0 top
JP134  MicroB  [USB-B-MICRO-SMD_V03]  135.25,137.41 0 top
JP135  MicroB  [USB-B-MICRO-SMD_V03]  135.25,152.65 0 top
JP136  1x8 FEMALE PTH  [1X08_LOCK]  219.71,117.09 0 top
JP137  M02JST-PTH-2  [JST-2-PTH]  264.16,161.54 0 top
JP138  POWER_JACKPTH_LOCK  [POWER_JACK_PTH_LOCK]  252.48,124.46 270 top
JP139  1X6 FEMALE PTH  [1X06-SIP_LOCK]  326.39,117.09 0 top
JP140  1X8 FEMALE PTH  [1X08_LOCK]  339.09,165.35 180 top
JP141  1X8 FEMALE PTH  [1X08_LOCK]  321.31,117.09 180 top
JP142  1X10 FEMALE PTH  [1X10_LOCK]  317.5,165.35 180 top
JP143  2X6 FEMALE  [2X6]  364.49,152.65 90 top
JP144  2X6 FEMALE  [2X6]  356.87,165.35 180 top
JP145  2X6 FEMALE  [2X6]  361.95,129.79 270 top
JP146  2X6 FEMALE  [2X6]  364.49,134.87 90 top
JP147  [2X3]  339.09,145.03 270 top
JP148  DNP  [2X5_PTH_SILK_.05]  294.64,133.6 90 top
JP149  2X6 FEMALE  [2X6]  290.83,166.62 180 top
JP150  DNP  [2X5_PTH_SILK_.05]  297.18,131.06 0 top
JP151  MicroB  [USB-B-MICRO-SMD_V03]  257.18,137.41 0 top
JP152  MicroB  [USB-B-MICRO-SMD_V03]  257.18,152.65 0 top
JP153  1x8 FEMALE PTH  [1X08_LOCK]  341.63,117.09 0 top
JP154  M02JST-PTH-2  [JST-2-PTH]  20.32,215.39 0 top
JP155  POWER_JACKPTH_LOCK  [POWER_JACK_PTH_LOCK]  8.64,178.31 270 top
JP156  1X6 FEMALE PTH  [1X06-SIP_LOCK]  82.55,170.94 0 top
JP157  1X8 FEMALE PTH  [1X08_LOCK]  95.25,219.2 180 top
JP158  1X8 FEMALE PTH  [1X08_LOCK]  77.47,170.94 180 top
JP159  1X10 FEMALE PTH  [1X10_LOCK]  73.66,219.2 180 top
JP160  2X6 FEMALE  [2X6]  120.65,206.5 90 top
JP161  2X6 FEMALE  [2X6]  113.03,219.2 180 top
JP162  2X6 FEMALE  [2X6]  118.11,183.64 270 top
JP163  2X6 FEMALE  [2X6]  120.65,188.72 90 top
JP164  [2X3]  95.25,198.88 270 top
JP165  DNP  [2X5_PTH_SILK_.05]  50.8,187.45 90 top
JP166  2X6 FEMALE  [2X6]  46.99,220.47 180 top
JP167  DNP  [2X5_PTH_SILK_.05]  53.34,184.91 0 top
JP168  MicroB  [USB-B-MICRO-SMD_V03]  13.34,191.26 0 top
JP169  MicroB  [USB-B-MICRO-SMD_V03]  13.34,206.5 0 top
JP170  1x8 FEMALE PTH  [1X08_LOCK]  97.79,170.94 0 top
JP171  M02JST-PTH-2  [JST-2-PTH]  142.24,215.39 0 top
JP172  POWER_JACKPTH_LOCK  [POWER_JACK_PTH_LOCK]  130.56,178.31 270 top
JP173  1X6 FEMALE PTH  [1X06-SIP_LOCK]  204.47,170.94 0 top
JP174  1X8 FEMALE PTH  [1X08_LOCK]  217.17,219.2 180 top
JP175  1X8 FEMALE PTH  [1X08_LOCK]  199.39,170.94 180 top
JP176  1X10 FEMALE PTH  [1X10_LOCK]  195.58,219.2 180 top
JP177  2X6 FEMALE  [2X6]  242.57,206.5 90 top
JP178  2X6 FEMALE  [2X6]  234.95,219.2 180 top
JP179  2X6 FEMALE  [2X6]  240.03,183.64 270 top
JP180  2X6 FEMALE  [2X6]  242.57,188.72 90 top
JP181  [2X3]  217.17,198.88 270 top
JP182  DNP  [2X5_PTH_SILK_.05]  172.72,187.45 90 top
JP183  2X6 FEMALE  [2X6]  168.91,220.47 180 top
JP184  DNP  [2X5_PTH_SILK_.05]  175.26,184.91 0 top
JP185  MicroB  [USB-B-MICRO-SMD_V03]  135.25,191.26 0 top
JP186  MicroB  [USB-B-MICRO-SMD_V03]  135.25,206.5 0 top
JP187  1x8 FEMALE PTH  [1X08_LOCK]  219.71,170.94 0 top
JP188  M02JST-PTH-2  [JST-2-PTH]  264.16,215.39 0 top
JP189  POWER_JACKPTH_LOCK  [POWER_JACK_PTH_LOCK]  252.48,178.31 270 top
JP190  1X6 FEMALE PTH  [1X06-SIP_LOCK]  326.39,170.94 0 top
JP191  1X8 FEMALE PTH  [1X08_LOCK]  339.09,219.2 180 top
JP192  1X8 FEMALE PTH  [1X08_LOCK]  321.31,170.94 180 top
JP193  1X10 FEMALE PTH  [1X10_LOCK]  317.5,219.2 180 top
JP194  2X6 FEMALE  [2X6]  364.49,206.5 90 top
JP195  2X6 FEMALE  [2X6]  356.87,219.2 180 top
JP196  2X6 FEMALE  [2X6]  361.95,183.64 270 top
JP197  2X6 FEMALE  [2X6]  364.49,188.72 90 top
JP198  [2X3]  339.09,198.88 270 top
JP199  DNP  [2X5_PTH_SILK_.05]  294.64,187.45 90 top
JP200  2X6 FEMALE  [2X6]  290.83,220.47 180 top
JP201  DNP  [2X5_PTH_SILK_.05]  297.18,184.91 0 top
JP202  MicroB  [USB-B-MICRO-SMD_V03]  257.18,191.26 0 top
JP203  MicroB  [USB-B-MICRO-SMD_V03]  257.18,206.5 0 top
JP204  1x8 FEMALE PTH  [1X08_LOCK]  341.63,170.94 0 top
LOGO1  SFE_LOGO_NAME_FLAME.2_INCH  [SFE_LOGO_NAME_FLAME_.2]  88.9,39.62 0 top
LOGO2  OSHW-LOGOS  [OSHW-LOGO-S]  102.87,34.8 0 top
LOGO3  SFE_LOGO_NAME_FLAME.2_INCH  [SFE_LOGO_NAME_FLAME_.2]  210.82,39.62 0 top
LOGO4  OSHW-LOGOS  [OSHW-LOGO-S]  224.79,34.8 0 top
LOGO5  SFE_LOGO_NAME_FLAME.2_INCH  [SFE_LOGO_NAME_FLAME_.2]  332.74,39.62 0 top
LOGO6  OSHW-LOGOS  [OSHW-LOGO-S]  346.71,34.8 0 top
LOGO7  SFE_LOGO_NAME_FLAME.2_INCH  [SFE_LOGO_NAME_FLAME_.2]  88.9,93.47 0 top
LOGO8  OSHW-LOGOS  [OSHW-LOGO-S]  102.87,88.65 0 top
LOGO9  SFE_LOGO_NAME_FLAME.2_INCH  [SFE_LOGO_NAME_FLAME_.2]  210.82,93.47 0 top
LOGO10  OSHW-LOGOS  [OSHW-LOGO-S]  224.79,88.65 0 top
LOGO11  SFE_LOGO_NAME_FLAME.2_INCH  [SFE_LOGO_NAME_FLAME_.2]  332.74,93.47 0 top
LOGO12  OSHW-LOGOS  [OSHW-LOGO-S]  346.71,88.65 0 top
LOGO13  SFE_LOGO_NAME_FLAME.2_INCH  [SFE_LOGO_NAME_FLAME_.2]  88.9,147.32 0 top
LOGO14  OSHW-LOGOS  [OSHW-LOGO-S]  102.87,142.49 0 top
LOGO15  SFE_LOGO_NAME_FLAME.2_INCH  [SFE_LOGO_NAME_FLAME_.2]  210.82,147.32 0 top
LOGO16  OSHW-LOGOS  [OSHW-LOGO-S]  224.79,142.49 0 top
LOGO17  SFE_LOGO_NAME_FLAME.2_INCH  [SFE_LOGO_NAME_FLAME_.2]  332.74,147.32 0 top
LOGO18  OSHW-LOGOS  [OSHW-LOGO-S]  346.71,142.49 0 top
LOGO19  SFE_LOGO_NAME_FLAME.2_INCH  [SFE_LOGO_NAME_FLAME_.2]  88.9,201.17 0 top
LOGO20  OSHW-LOGOS  [OSHW-LOGO-S]  102.87,196.34 0 top
LOGO21  SFE_LOGO_NAME_FLAME.2_INCH  [SFE_LOGO_NAME_FLAME_.2]  210.82,201.17 0 top
LOGO22  OSHW-LOGOS  [OSHW-LOGO-S]  224.79,196.34 0 top
LOGO23  SFE_LOGO_NAME_FLAME.2_INCH  [SFE_LOGO_NAME_FLAME_.2]  332.74,201.17 0 top
LOGO24  OSHW-LOGOS  [OSHW-LOGO-S]  346.71,196.34 0 top
R1  4.7K  [0603-RES]  59.69,33.53 180 top
R2  4.7K  [0603-RES]  41.91,28.45 90 top
R3  10K  [0603-RES]  24.13,34.8 90 top
R4  10K  [0603-RES]  20.32,46.23 270 top
R5  20k  [0603-RES]  20.32,42.42 90 top
R6  20k  [0603-RES]  26.04,34.8 90 top
R7  2.2k  [0603-RES]  55.88,38.61 0 top
R8  2.2k  [0603-RES]  55.88,40.26 0 top
R9  1K  [0603-RES]  49.53,50.04 180 top
R10  1K  [0603-RES]  48.9,48.01 0 top
R11  22  [0402-RES]  189.23,20.19 180 top
R12  22  [0402-RES]  189.23,18.92 180 top
R13  22  [0402-RES]  169.29,36.96 0 top
R14  22  [0402-RES]  169.29,38.1 0 top
R15  1K  [0603-RES]  171.07,42.04 0 top
R16  22  [0402-RES]  67.31,20.19 180 top
R17  22  [0402-RES]  67.31,18.92 180 top
R18  22  [0402-RES]  47.37,36.96 0 top
R19  22  [0402-RES]  47.37,38.1 0 top
R20  1K  [0603-RES]  49.15,42.04 0 top
R21  1K  [0603-RES]  58.8,50.93 180 top
R22  1K  [0603-RES]  180.72,50.93 180 top
R23  4.7K  [0603-RES]  181.61,33.53 180 top
R24  4.7K  [0603-RES]  163.83,28.45 90 top
R25  10K  [0603-RES]  146.05,34.8 90 top
R26  10K  [0603-RES]  142.24,46.23 270 top
R27  20k  [0603-RES]  142.24,42.42 90 top
R28  20k  [0603-RES]  147.96,34.8 90 top
R29  2.2k  [0603-RES]  177.8,38.61 0 top
R30  2.2k  [0603-RES]  177.8,40.26 0 top
R31  1K  [0603-RES]  171.45,50.04 180 top
R32  1K  [0603-RES]  170.81,48.01 0 top
R33  22  [0402-RES]  311.15,20.19 180 top
R34  22  [0402-RES]  311.15,18.92 180 top
R35  22  [0402-RES]  291.21,36.96 0 top
R36  22  [0402-RES]  291.21,38.1 0 top
R37  1K  [0603-RES]  292.99,42.04 0 top
R38  1K  [0603-RES]  302.64,50.93 180 top
R39  4.7K  [0603-RES]  303.53,33.53 180 top
R40  4.7K  [0603-RES]  285.75,28.45 90 top
R41  10K  [0603-RES]  267.97,34.8 90 top
R42  10K  [0603-RES]  264.16,46.23 270 top
R43  20k  [0603-RES]  264.16,42.42 90 top
R44  20k  [0603-RES]  269.88,34.8 90 top
R45  2.2k  [0603-RES]  299.72,38.61 0 top
R46  2.2k  [0603-RES]  299.72,40.26 0 top
R47  1K  [0603-RES]  293.37,50.04 180 top
R48  1K  [0603-RES]  292.74,48.01 0 top
R49  22  [0402-RES]  67.31,74.04 180 top
R50  22  [0402-RES]  67.31,72.77 180 top
R51  22  [0402-RES]  47.37,90.81 0 top
R52  22  [0402-RES]  47.37,91.95 0 top
R53  1K  [0603-RES]  49.15,95.89 0 top
R54  1K  [0603-RES]  58.8,104.78 180 top
R55  4.7K  [0603-RES]  59.69,87.38 180 top
R56  4.7K  [0603-RES]  41.91,82.3 90 top
R57  10K  [0603-RES]  24.13,88.65 90 top
R58  10K  [0603-RES]  20.32,100.08 270 top
R59  20k  [0603-RES]  20.32,96.27 90 top
R60  20k  [0603-RES]  26.04,88.65 90 top
R61  2.2k  [0603-RES]  55.88,92.46 0 top
R62  2.2k  [0603-RES]  55.88,94.11 0 top
R63  1K  [0603-RES]  49.53,103.89 180 top
R64  1K  [0603-RES]  48.9,101.85 0 top
R65  22  [0402-RES]  189.23,74.04 180 top
R66  22  [0402-RES]  189.23,72.77 180 top
R67  22  [0402-RES]  169.29,90.81 0 top
R68  22  [0402-RES]  169.29,91.95 0 top
R69  1K  [0603-RES]  171.07,95.89 0 top
R70  1K  [0603-RES]  180.72,104.78 180 top
R71  4.7K  [0603-RES]  181.61,87.38 180 top
R72  4.7K  [0603-RES]  163.83,82.3 90 top
R73  10K  [0603-RES]  146.05,88.65 90 top
R74  10K  [0603-RES]  142.24,100.08 270 top
R75  20k  [0603-RES]  142.24,96.27 90 top
R76  20k  [0603-RES]  147.96,88.65 90 top
R77  2.2k  [0603-RES]  177.8,92.46 0 top
R78  2.2k  [0603-RES]  177.8,94.11 0 top
R79  1K  [0603-RES]  171.45,103.89 180 top
R80  1K  [0603-RES]  170.81,101.85 0 top
R81  22  [0402-RES]  311.15,74.04 180 top
R82  22  [0402-RES]  311.15,72.77 180 top
R83  22  [0402-RES]  291.21,90.81 0 top
R84  22  [0402-RES]  291.21,91.95 0 top
R85  1K  [0603-RES]  292.99,95.89 0 top
R86  1K  [0603-RES]  302.64,104.78 180 top
R87  4.7K  [0603-RES]  303.53,87.38 180 top
R88  4.7K  [0603-RES]  285.75,82.3 90 top
R89  10K  [0603-RES]  267.97,88.65 90 top
R90  10K  [0603-RES]  264.16,100.08 270 top
R91  20k  [0603-RES]  264.16,96.27 90 top
R92  20k  [0603-RES]  269.88,88.65 90 top
R93  2.2k  [0603-RES]  299.72,92.46 0 top
R94  2.2k  [0603-RES]  299.72,94.11 0 top
R95  1K  [0603-RES]  293.37,103.89 180 top
R96  1K  [0603-RES]  292.74,101.85 0 top
R97  22  [0402-RES]  67.31,127.89 180 top
R98  22  [0402-RES]  67.31,126.62 180 top
R99  22  [0402-RES]  47.37,144.65 0 top
R100  22  [0402-RES]  47.37,145.8 0 top
R101  1K  [0603-RES]  49.15,149.73 0 top
R102  1K  [0603-RES]  58.8,158.62 180 top
R103  4.7K  [0603-RES]  59.69,141.22 180 top
R104  4.7K  [0603-RES]  41.91,136.14 90 top
R105  10K  [0603-RES]  24.13,142.49 90 top
R106  10K  [0603-RES]  20.32,153.92 270 top
R107  20k  [0603-RES]  20.32,150.11 90 top
R108  20k  [0603-RES]  26.04,142.49 90 top
R109  2.2k  [0603-RES]  55.88,146.3 0 top
R110  2.2k  [0603-RES]  55.88,147.96 0 top
R111  1K  [0603-RES]  49.53,157.73 180 top
R112  1K  [0603-RES]  48.9,155.7 0 top
R113  22  [0402-RES]  189.23,127.89 180 top
R114  22  [0402-RES]  189.23,126.62 180 top
R115  22  [0402-RES]  169.29,144.65 0 top
R116  22  [0402-RES]  169.29,145.8 0 top
R117  1K  [0603-RES]  171.07,149.73 0 top
R118  1K  [0603-RES]  180.72,158.62 180 top
R119  4.7K  [0603-RES]  181.61,141.22 180 top
R120  4.7K  [0603-RES]  163.83,136.14 90 top
R121  10K  [0603-RES]  146.05,142.49 90 top
R122  10K  [0603-RES]  142.24,153.92 270 top
R123  20k  [0603-RES]  142.24,150.11 90 top
R124  20k  [0603-RES]  147.96,142.49 90 top
R125  2.2k  [0603-RES]  177.8,146.3 0 top
R126  2.2k  [0603-RES]  177.8,147.96 0 top
R127  1K  [0603-RES]  171.45,157.73 180 top
R128  1K  [0603-RES]  170.81,155.7 0 top
R129  22  [0402-RES]  311.15,127.89 180 top
R130  22  [0402-RES]  311.15,126.62 180 top
R131  22  [0402-RES]  291.21,144.65 0 top
R132  22  [0402-RES]  291.21,145.8 0 top
R133  1K  [0603-RES]  292.99,149.73 0 top
R134  1K  [0603-RES]  302.64,158.62 180 top
R135  4.7K  [0603-RES]  303.53,141.22 180 top
R136  4.7K  [0603-RES]  285.75,136.14 90 top
R137  10K  [0603-RES]  267.97,142.49 90 top
R138  10K  [0603-RES]  264.16,153.92 270 top
R139  20k  [0603-RES]  264.16,150.11 90 top
R140  20k  [0603-RES]  269.88,142.49 90 top
R141  2.2k  [0603-RES]  299.72,146.3 0 top
R142  2.2k  [0603-RES]  299.72,147.96 0 top
R143  1K  [0603-RES]  293.37,157.73 180 top
R144  1K  [0603-RES]  292.74,155.7 0 top
R145  22  [0402-RES]  67.31,181.74 180 top
R146  22  [0402-RES]  67.31,180.47 180 top
R147  22  [0402-RES]  47.37,198.5 0 top
R148  22  [0402-RES]  47.37,199.64 0 top
R149  1K  [0603-RES]  49.15,203.58 0 top
R150  1K  [0603-RES]  58.8,212.47 180 top
R151  4.7K  [0603-RES]  59.69,195.07 180 top
R152  4.7K  [0603-RES]  41.91,189.99 90 top
R153  10K  [0603-RES]  24.13,196.34 90 top
R154  10K  [0603-RES]  20.32,207.77 270 top
R155  20k  [0603-RES]  20.32,203.96 90 top
R156  20k  [0603-RES]  26.04,196.34 90 top
R157  2.2k  [0603-RES]  55.88,200.15 0 top
R158  2.2k  [0603-RES]  55.88,201.8 0 top
R159  1K  [0603-RES]  49.53,211.58 180 top
R160  1K  [0603-RES]  48.9,209.55 0 top
R161  22  [0402-RES]  189.23,181.74 180 top
R162  22  [0402-RES]  189.23,180.47 180 top
R163  22  [0402-RES]  169.29,198.5 0 top
R164  22  [0402-RES]  169.29,199.64 0 top
R165  1K  [0603-RES]  171.07,203.58 0 top
R166  1K  [0603-RES]  180.72,212.47 180 top
R167  4.7K  [0603-RES]  181.61,195.07 180 top